# Altium PCB AM6442 X7.PcbDoc (part 1 of 2)
Units mm, origin at the board's own origin, x right, y up, seen from the top; angles counter-clockwise.
Board outline 52 x 52 mm, 8 copper layers (SU, GNDU, HSU, PWRU, PWRD, HSD, GNDD, SD), stack 0.757 mm thick; 216 components, 45 nets, 958 pads, 229 vias.
Unrouted connection lines stored in the file: 81.
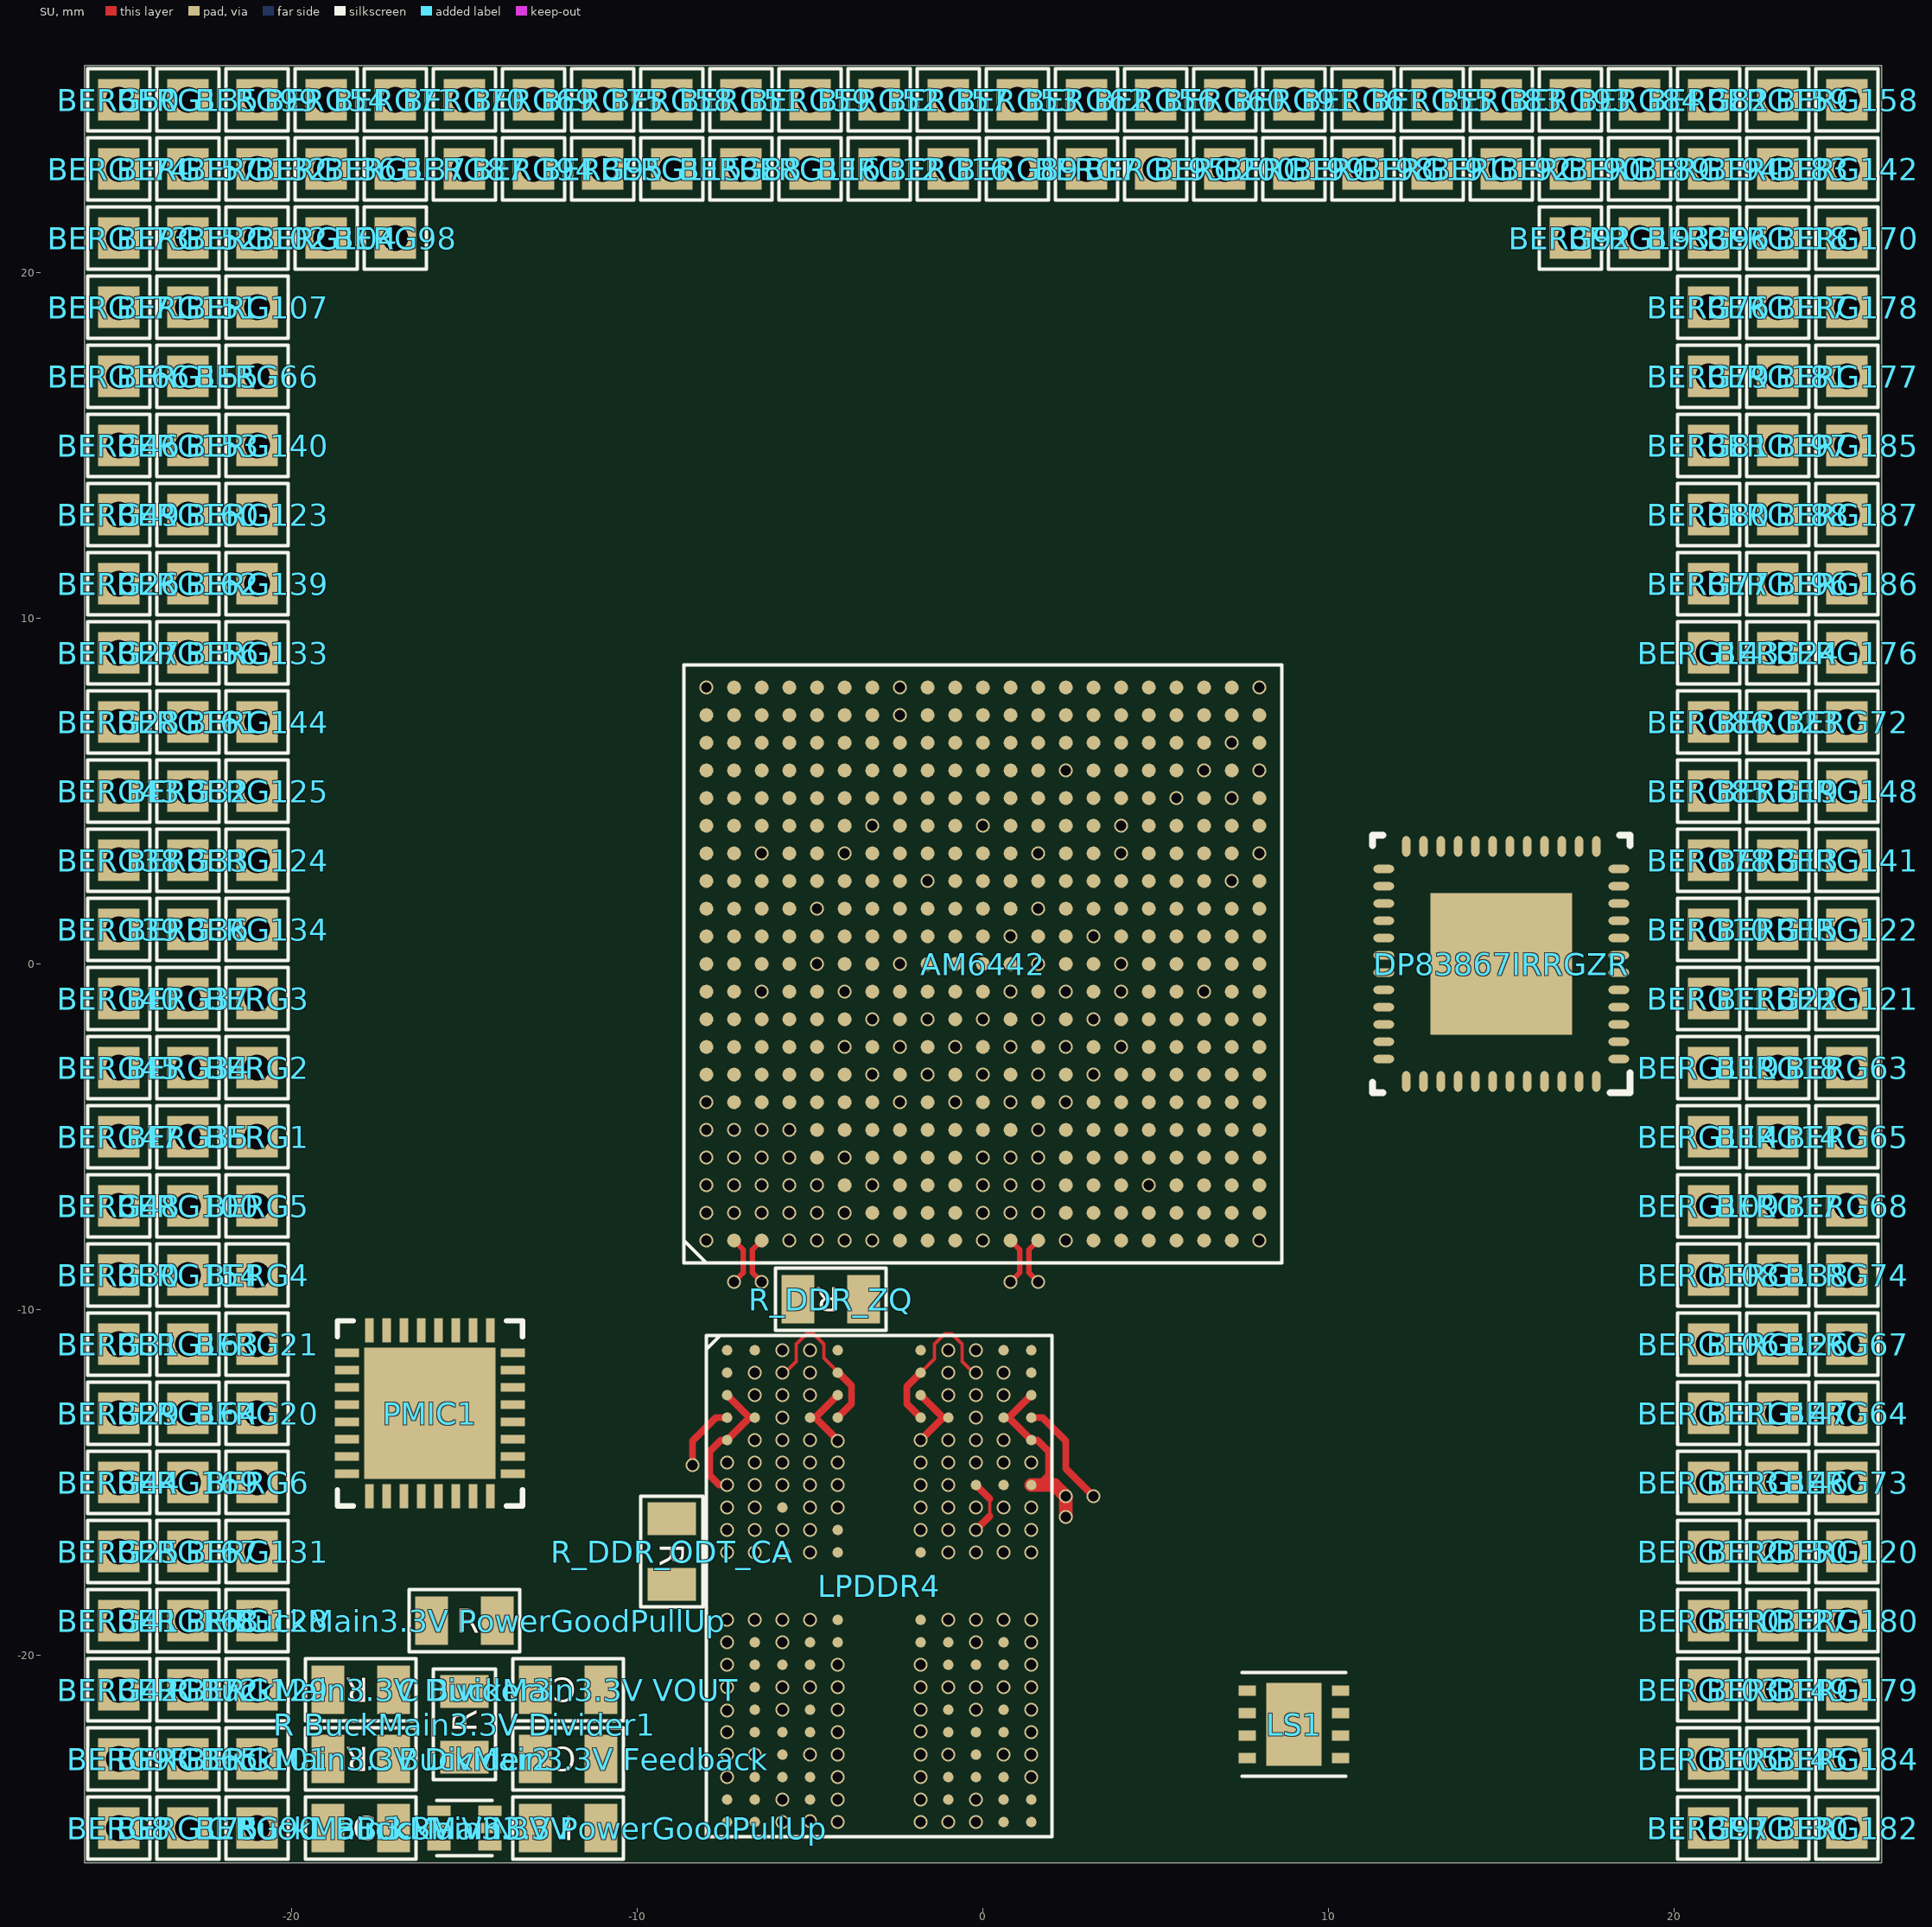
[diagram p0: SU view]
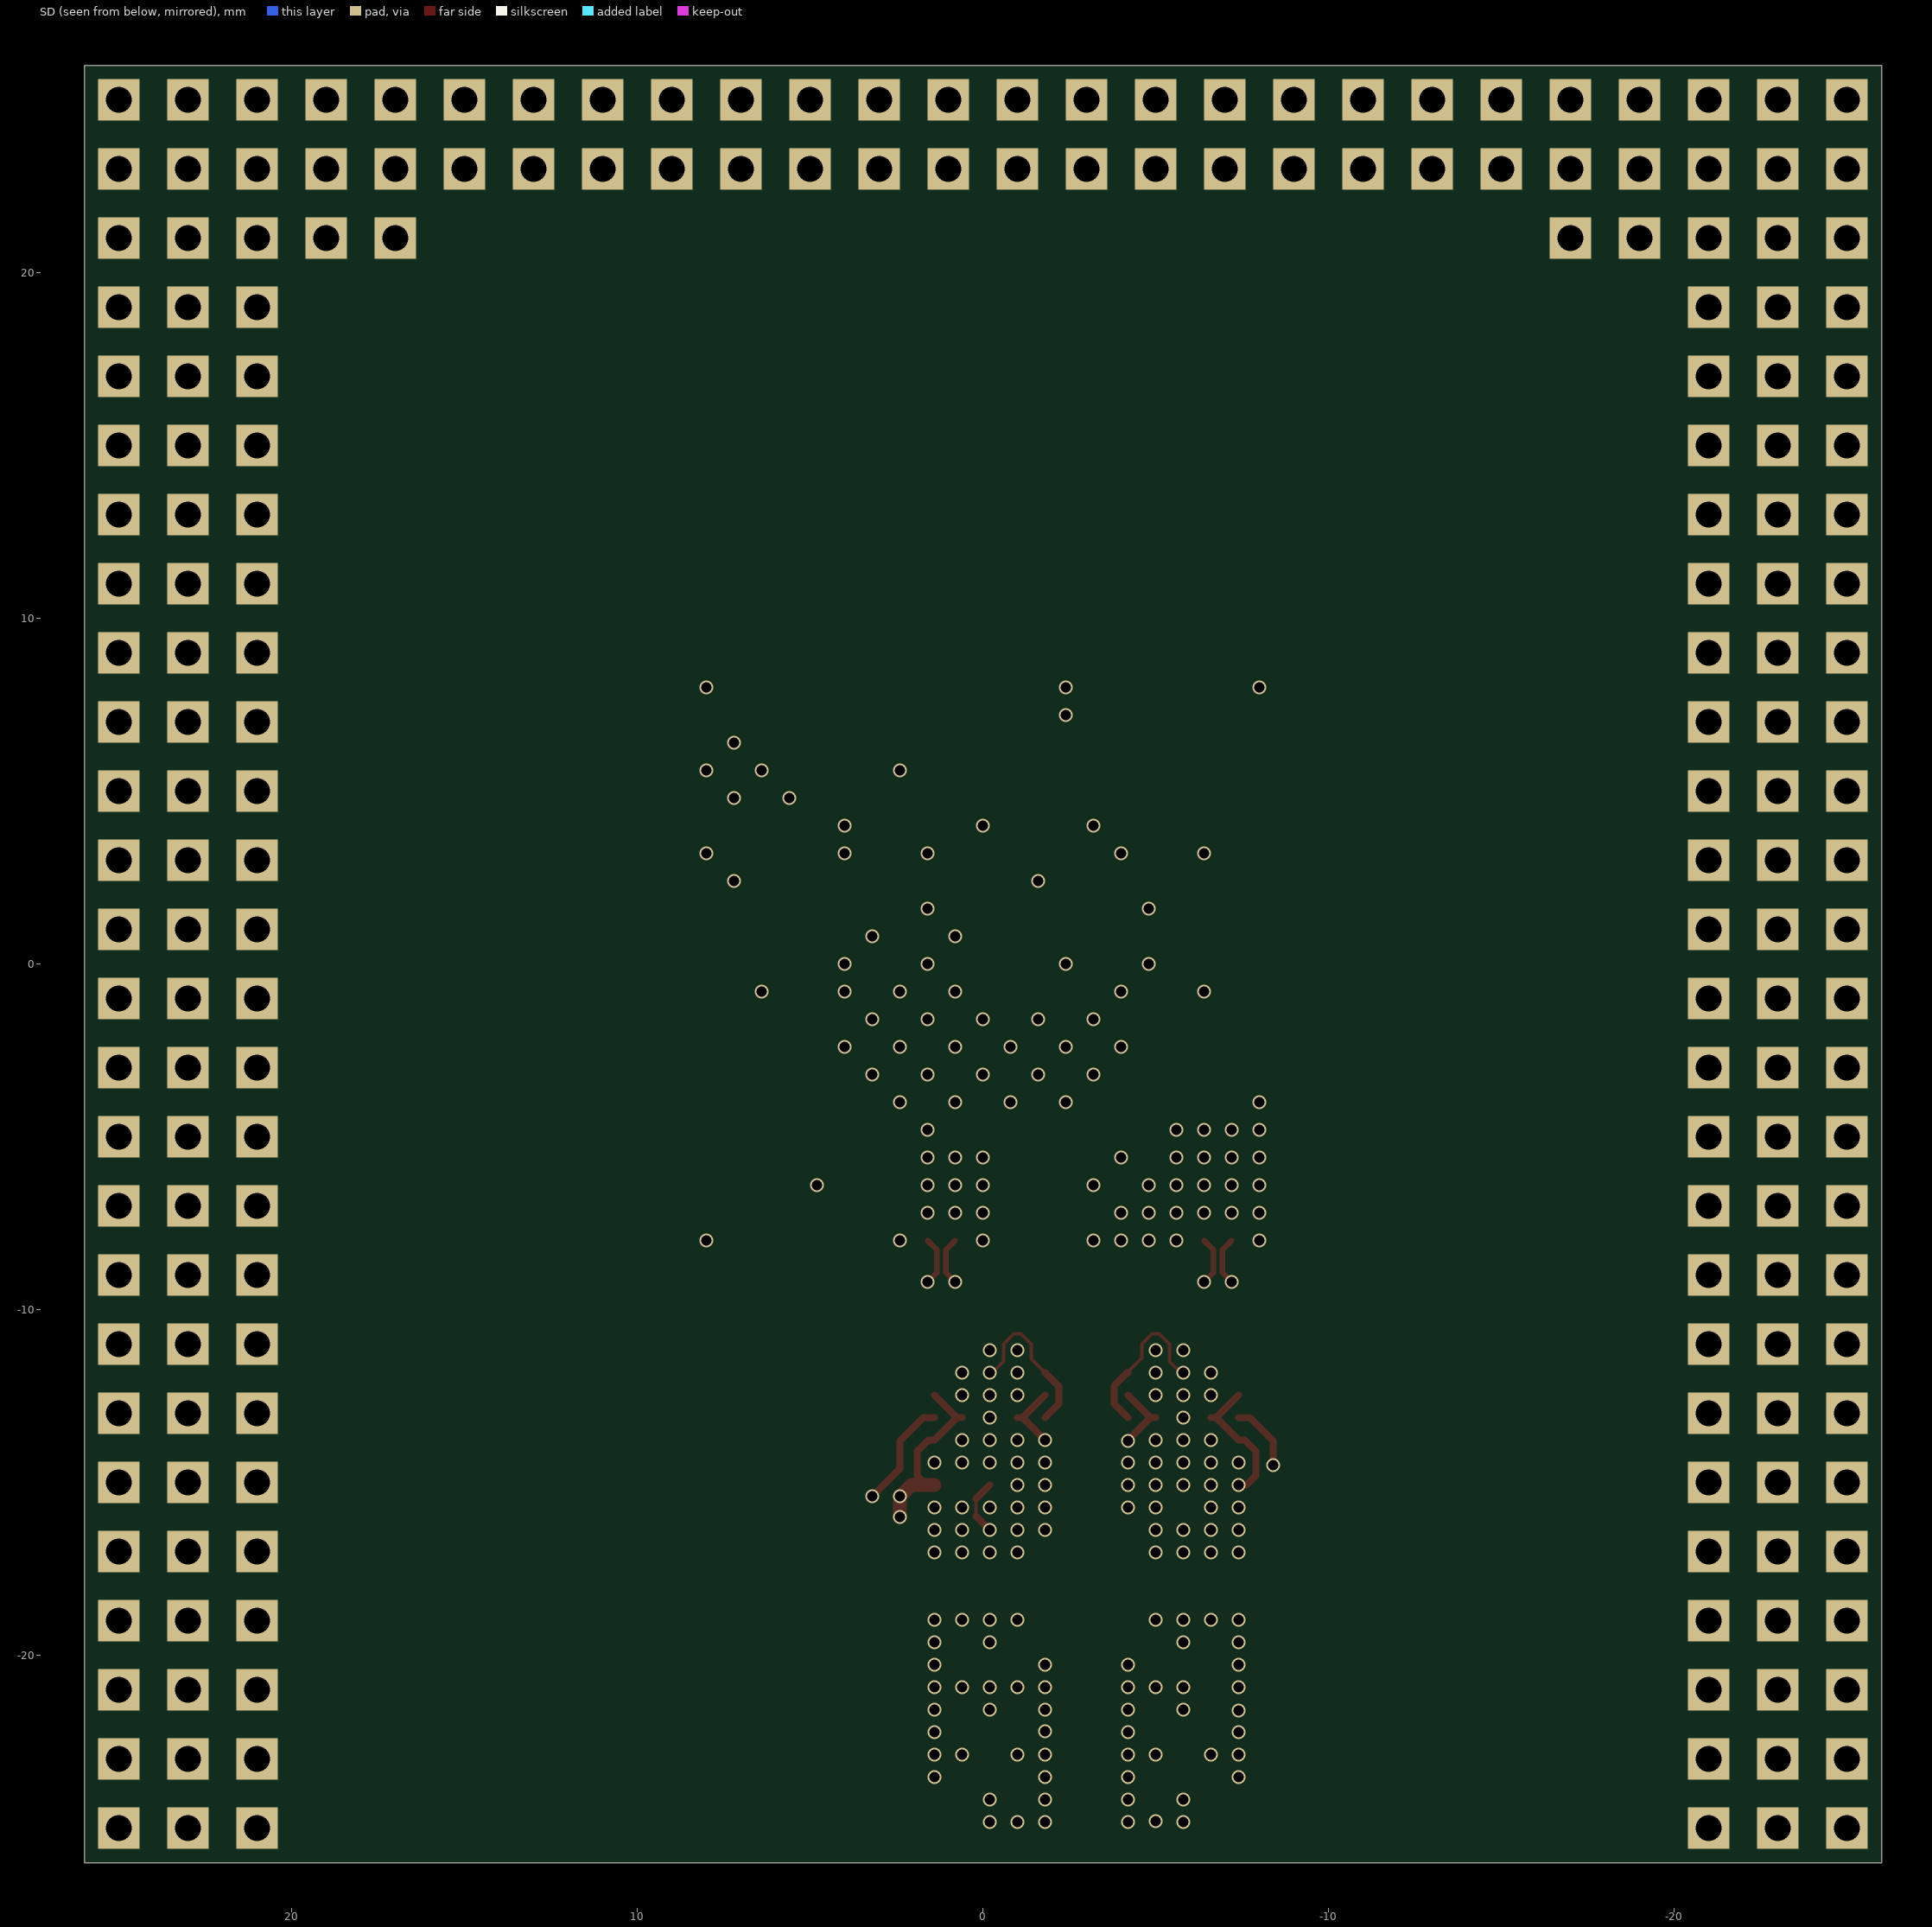
[diagram p1: SD view, seen from below]
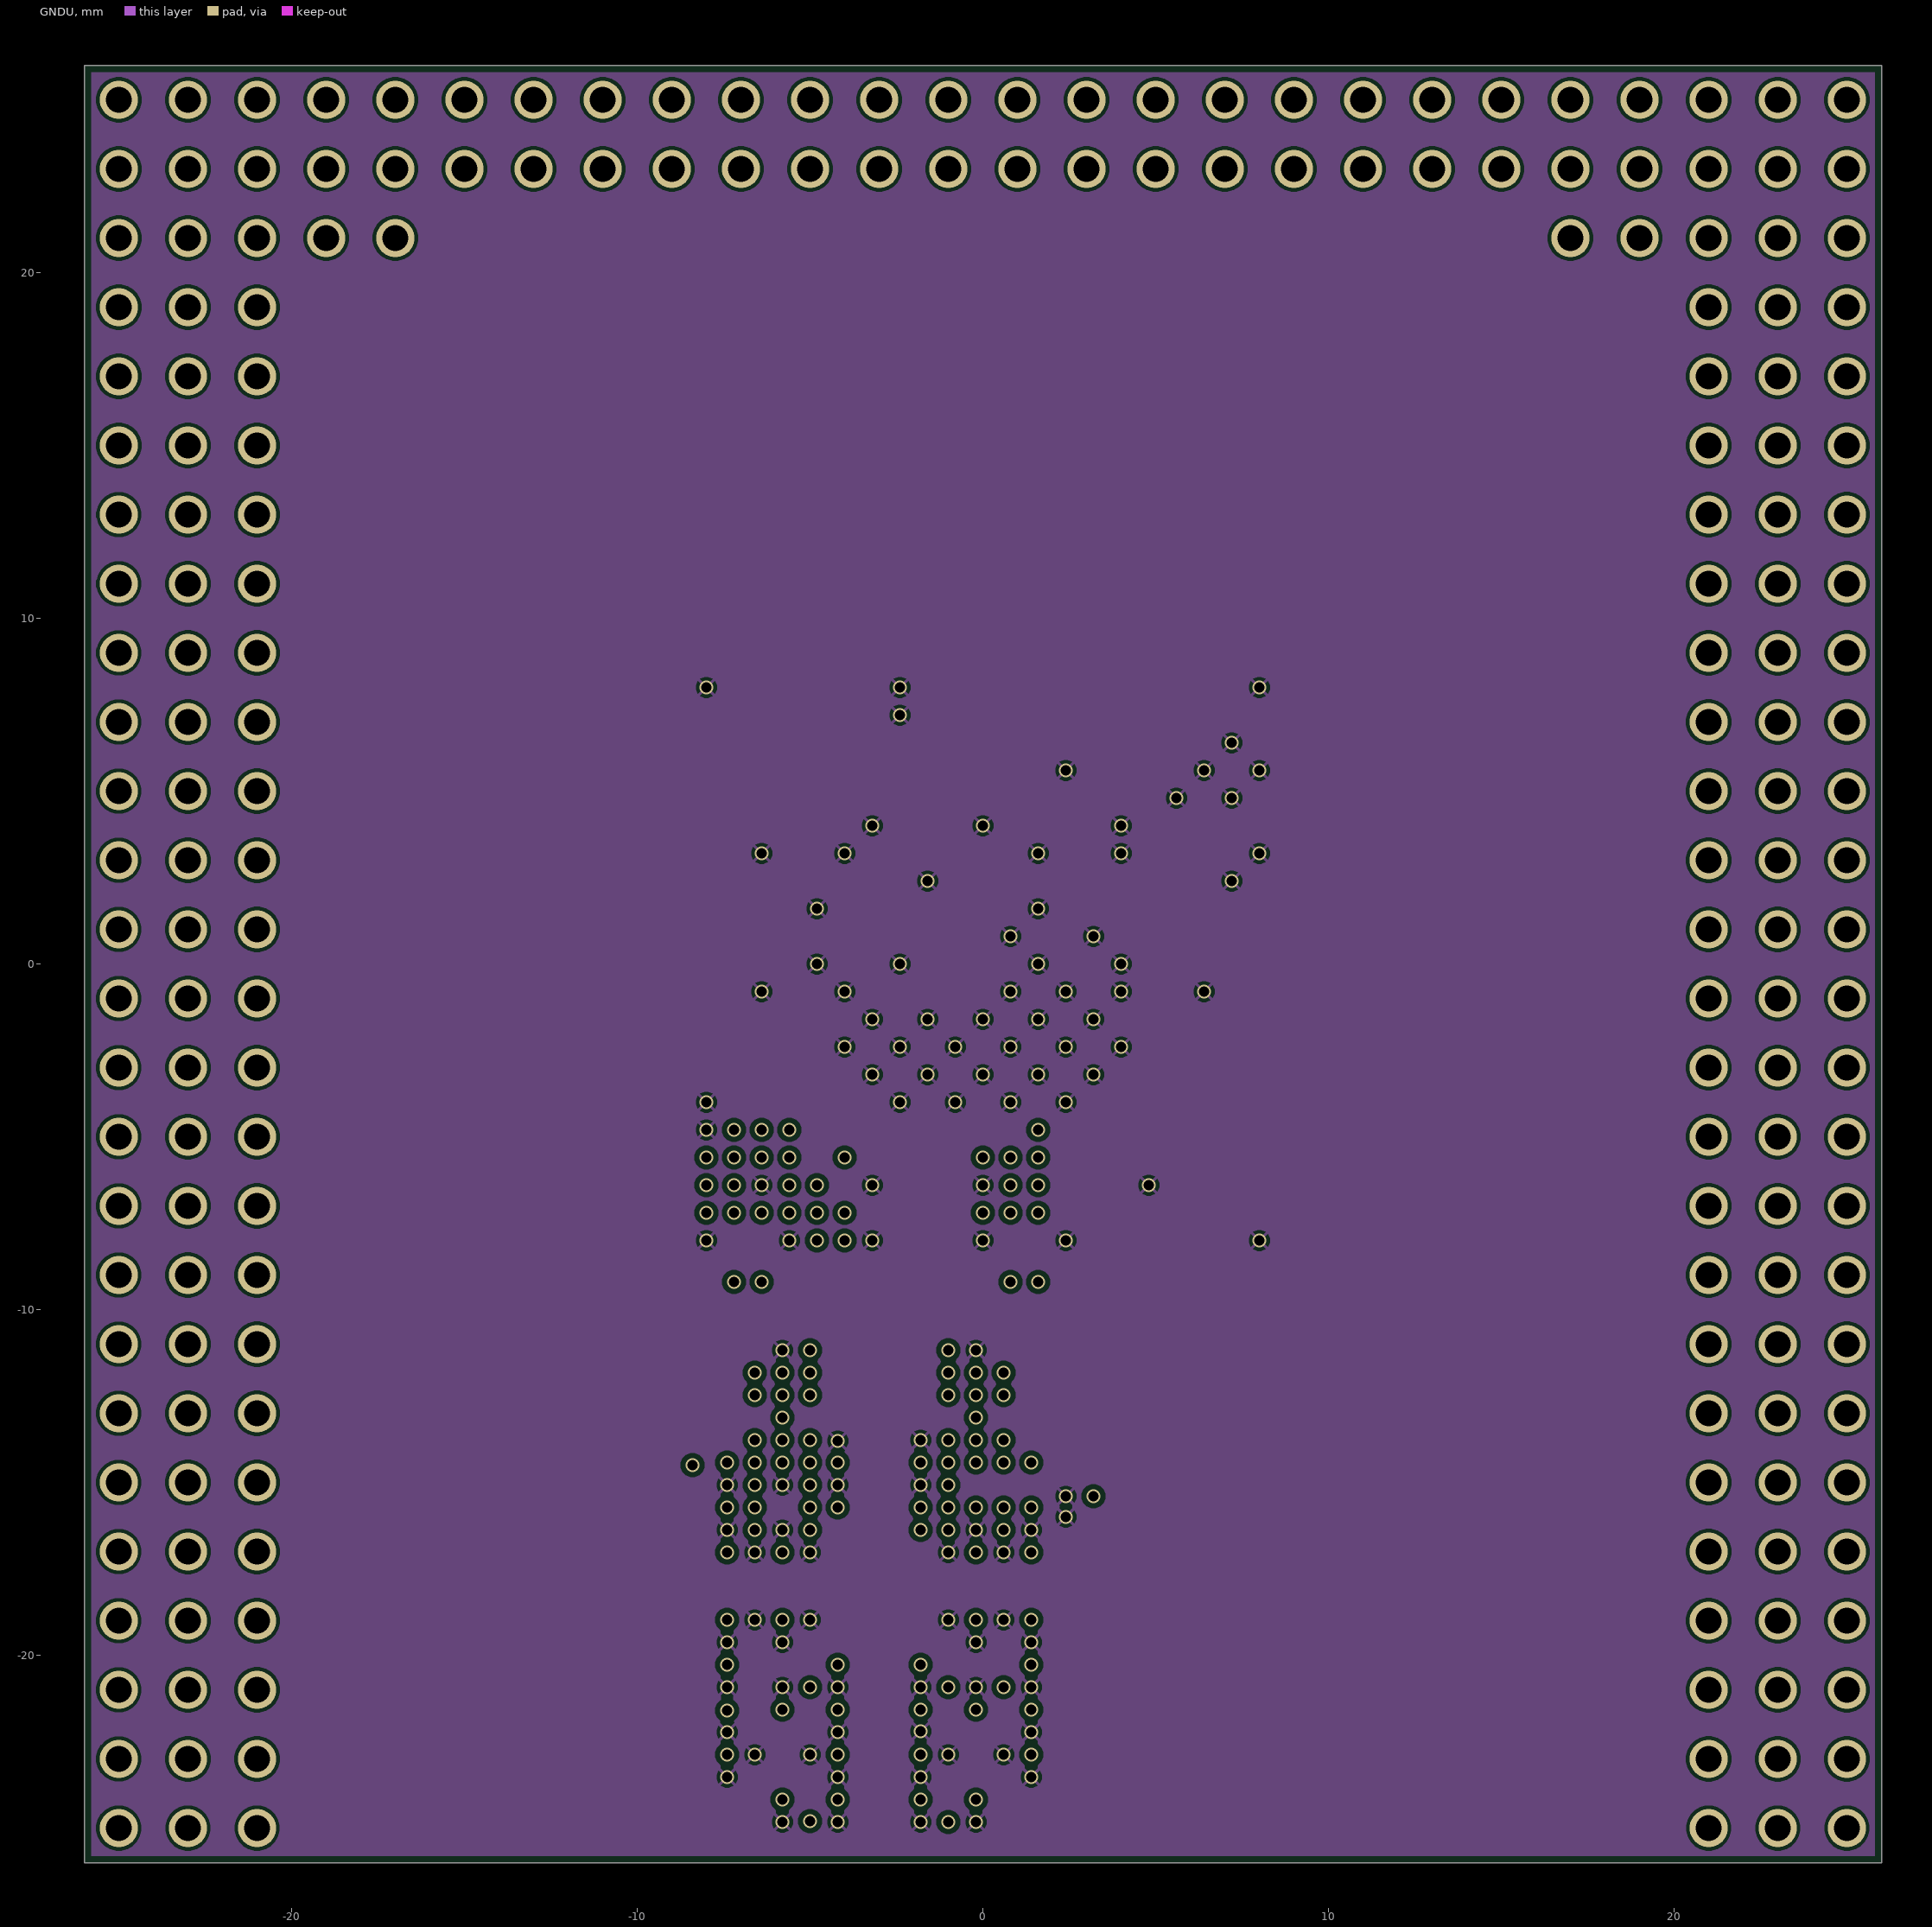
[diagram p2: GNDU]
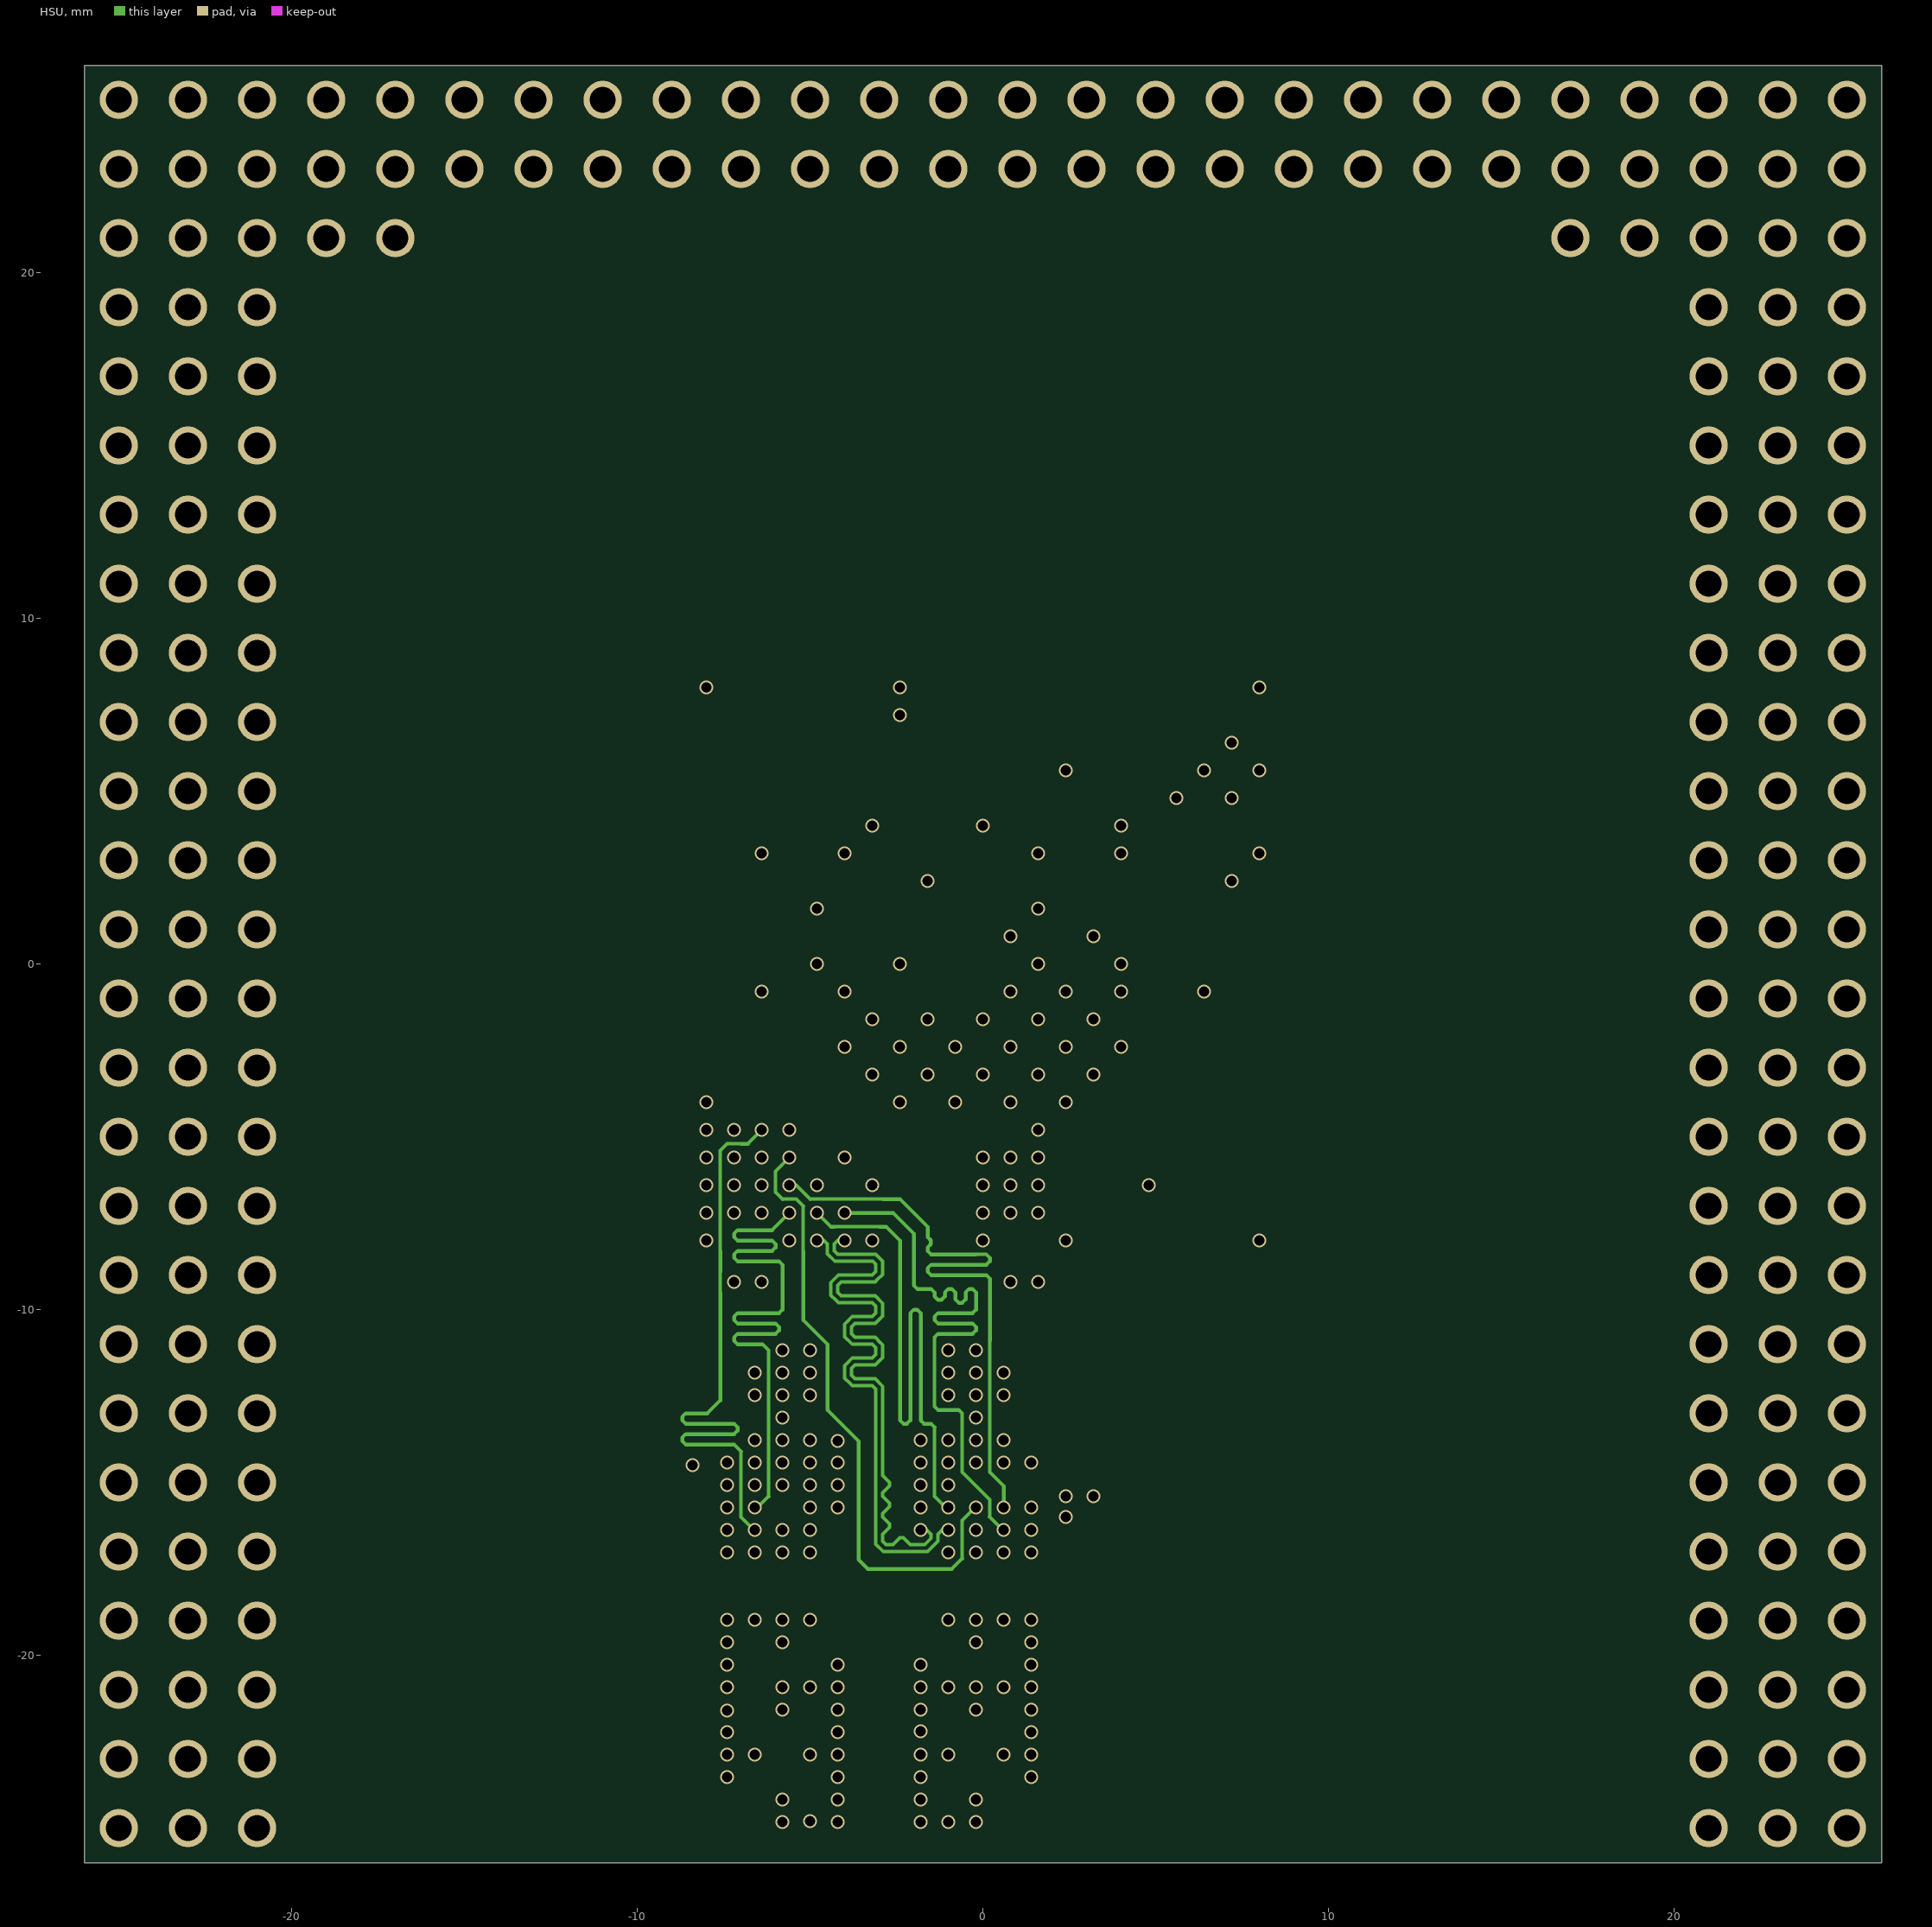
[diagram p3: HSU]
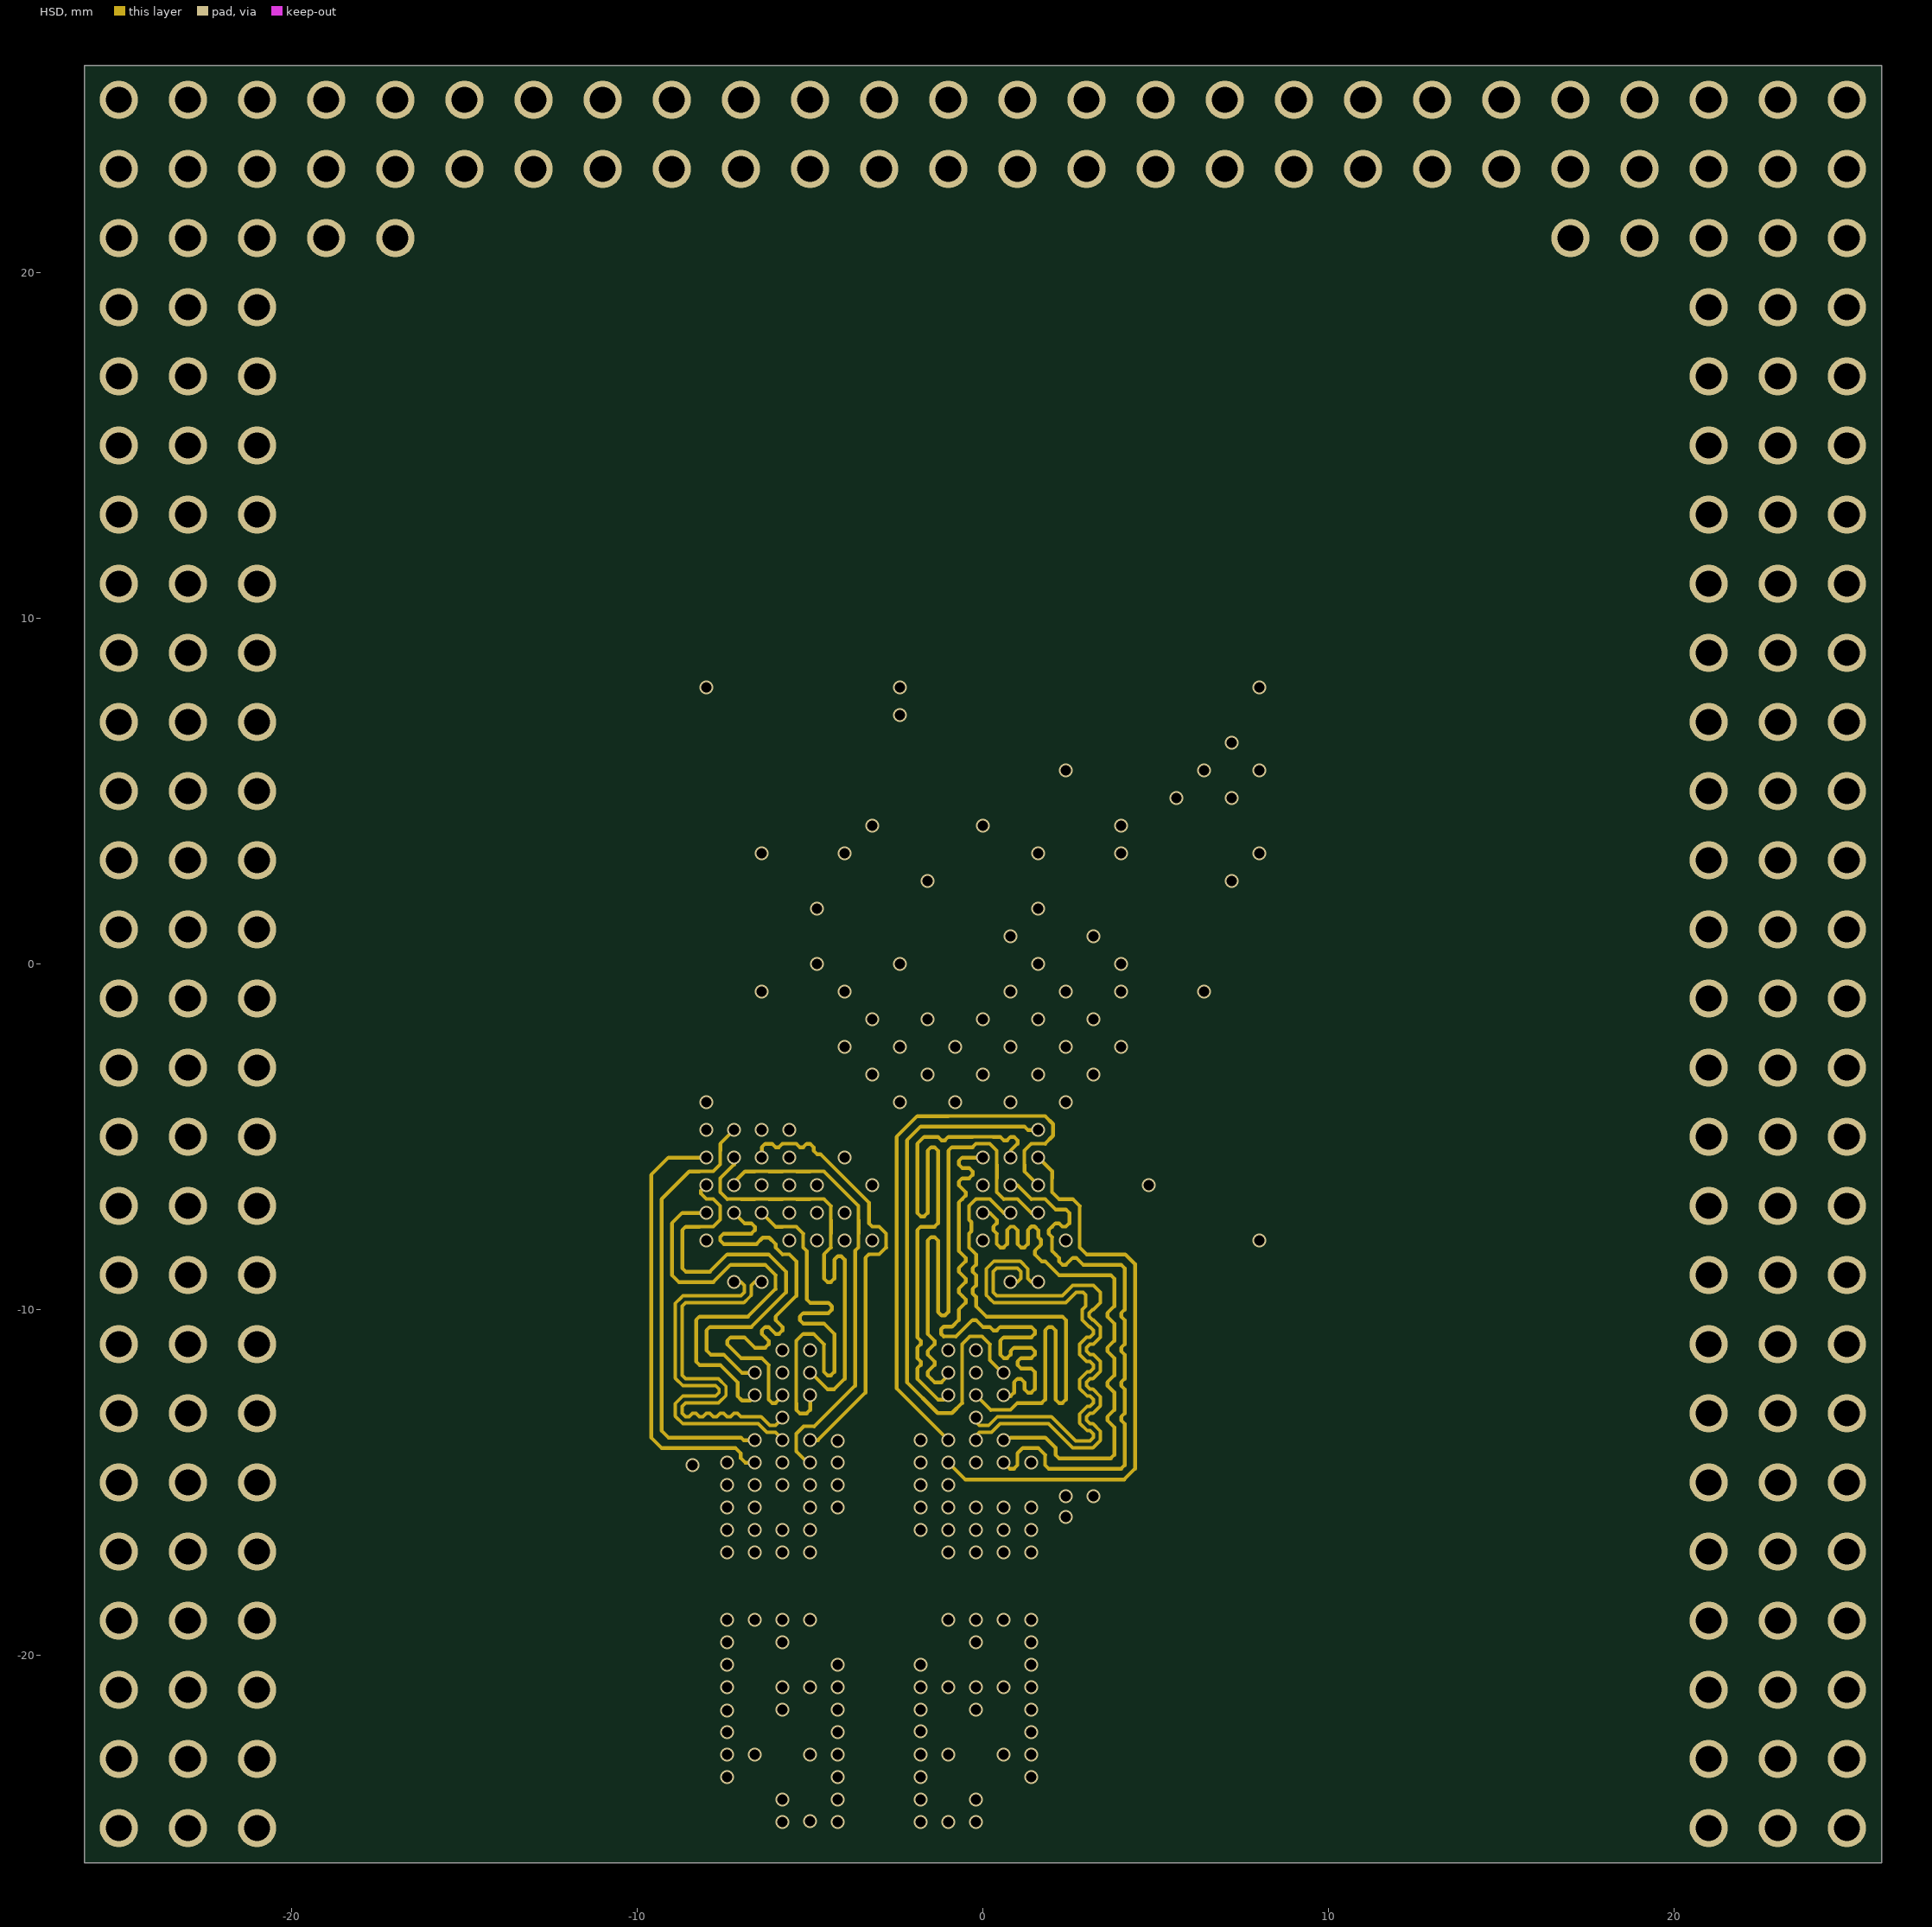
[diagram p4: HSD]
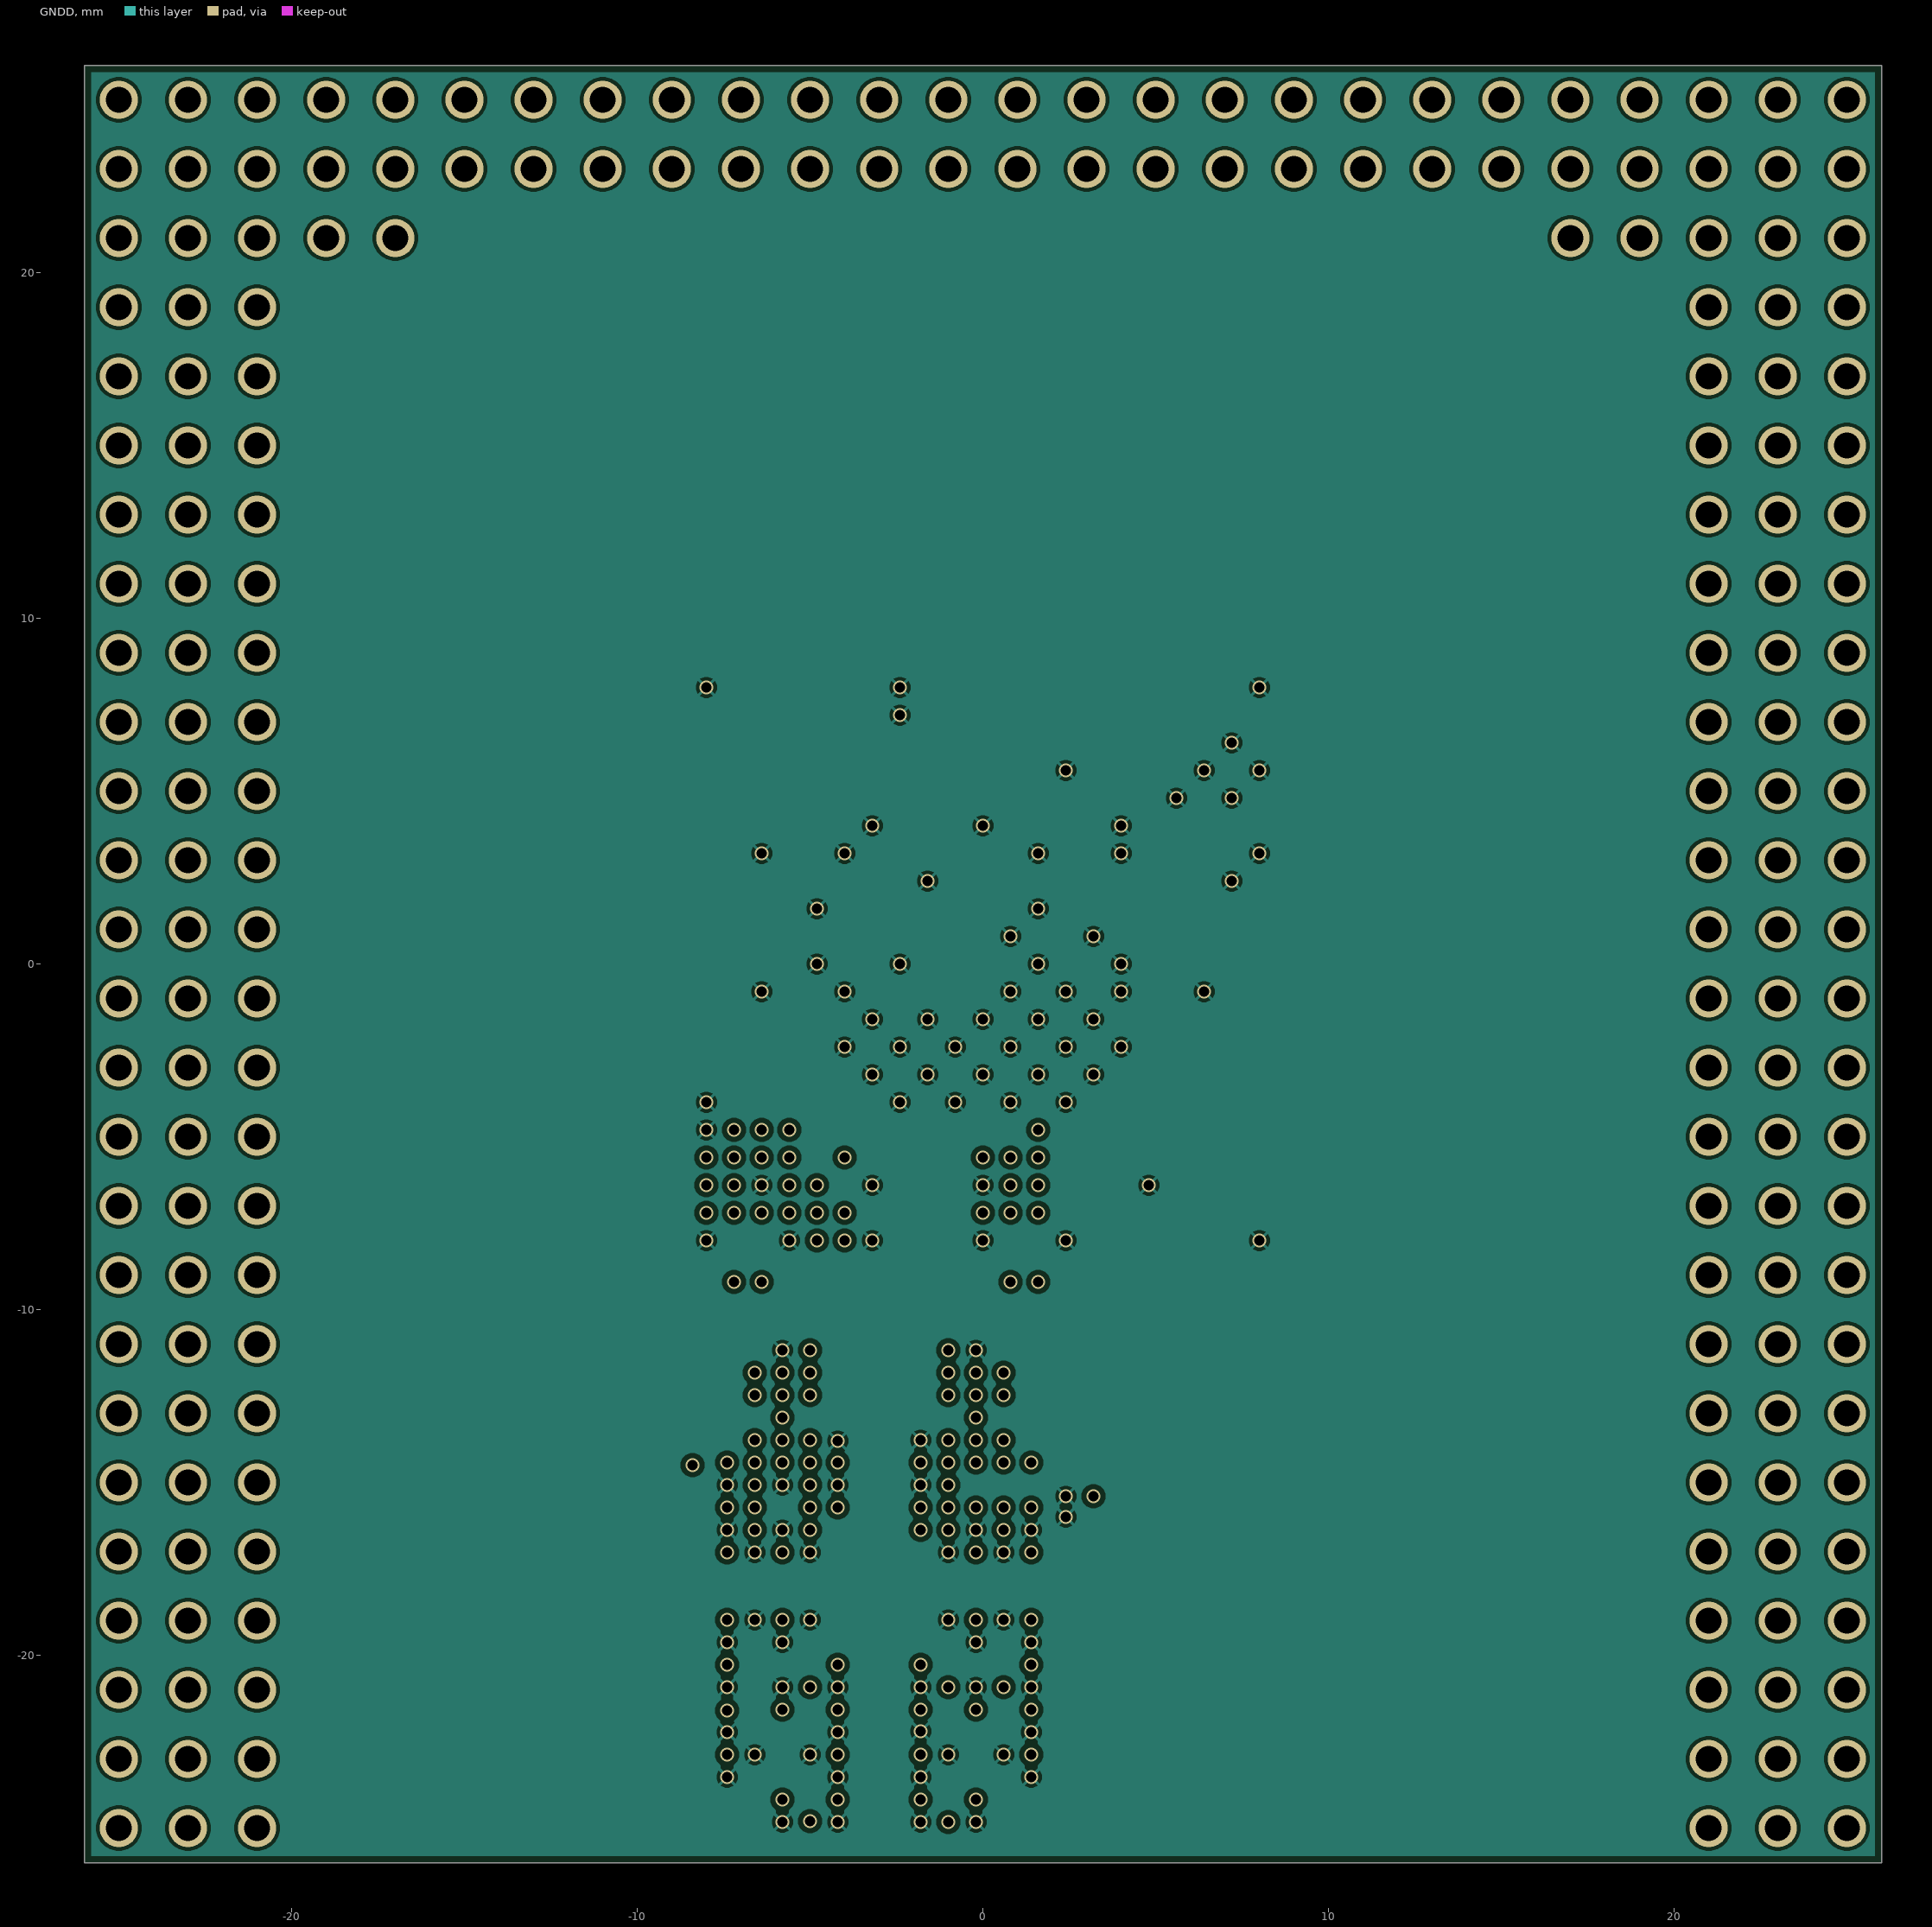
[diagram p5: GNDD]

## Layer stack, top to bottom
Top Solder: solder mask 0.03, Solder Resist, Dk 3.8
SU: signal copper 0.035
Prepreg 1/2: prepreg 0.0764, Prepreg, Dk 3.91
GNDU: signal copper 0.0152
Core 2/3: core 0.075, Core, Dk 3.99
HSU: signal copper 0.0152
Prepreg 3/4: prepreg 0.1088, Prepreg, Dk 4.16
PWRU: signal copper 0.0152
Core 4/5: core 0.075, Core, Dk 3.99
PWRD: signal copper 0.0152
Prepreg 5/6: prepreg 0.1088, Prepreg, Dk 4.16
HSD: signal copper 0.0152
Core 6/7: core 0.075, Core, Dk 3.99
GNDD: signal copper 0.0152
Prepreg 7/8: prepreg 0.0764, Prepreg, Dk 3.91
SD: signal copper 0.035
Bottom Solder: solder mask 0.03, Solder Resist, Dk 3.8

## Board outline
-26,-26 -26,26 26,26 26,-26

## Design rules (kind name [scope] priority, off if disabled: settings)
BoardOutlineClearance [All] p1 off: gap=0.2 ignorepadtopadclearanceinfootprint=FALSE
Clearance [All] p1: gap=0.099 ignorepadtopadclearanceinfootprint=TRUE except(0.199: Arc-Hole Track-Hole SMDPad-Hole THPad-Hole Via-Hole Fill-Hole Poly-Hole Region-Hole Text-Hole)
ComponentClearance [All] p1: gap=0 collisioncheckmode=3 verticalgap=2540 showdistances=FALSE
DiffPairsRouting DiffPairsRouting_DDR_Address_Clock [InDifferentialPairClass('DDR_Address_Clock')] p1: maxlimit=0.5 minlimit=0.09 mostfreqgap=0.11 toplayer_mingap=0.1 toplayer_prefgap=0.1 toplayer_minwidth=0.16 toplayer_maxwidth=0.16 toplayer_prefwidth=0.16 midlayer2_mingap=0.104 midlayer2_prefgap=0.104 midlayer2_minwidth=0.096 midlayer2_maxwidth=0.096 midlayer2_prefwidth=0.096 midlayer5_mingap=0.104 midlayer5_prefgap=0.104 midlayer5_minwidth=0.096 midlayer5_maxwidth=0.096 midlayer5_prefwidth=0.096 bottomlayer_mingap=0.1 bottomlayer_prefgap=0.1 bottomlayer_minwidth=0.16 bottomlayer_maxwidth=0.16 bottomlayer_prefwidth=0.16 impedanceprofiledriven=TRUE impedanceprofileid={31A8B4D8-5093-4C39-AB75-1D34C4341116} impedanceprofilevalue=80.000000 maxuncoupledlength=10
DiffPairsRouting DiffPairsRouting_DDR_Byte0_Clock [InDifferentialPairClass('DDR_Byte0_Clock')] p2: maxlimit=0.5 minlimit=0.09 mostfreqgap=0.11 toplayer_mingap=0.1 toplayer_prefgap=0.1 toplayer_minwidth=0.16 toplayer_maxwidth=0.16 toplayer_prefwidth=0.16 midlayer2_mingap=0.104 midlayer2_prefgap=0.104 midlayer2_minwidth=0.096 midlayer2_maxwidth=0.096 midlayer2_prefwidth=0.096 midlayer5_mingap=0.104 midlayer5_prefgap=0.104 midlayer5_minwidth=0.096 midlayer5_maxwidth=0.096 midlayer5_prefwidth=0.096 bottomlayer_mingap=0.1 bottomlayer_prefgap=0.1 bottomlayer_minwidth=0.16 bottomlayer_maxwidth=0.16 bottomlayer_prefwidth=0.16 impedanceprofiledriven=TRUE impedanceprofileid={31A8B4D8-5093-4C39-AB75-1D34C4341116} impedanceprofilevalue=80.000000 maxuncoupledlength=10
DiffPairsRouting DiffPairsRouting_DDR_Byte1_Clock [InDifferentialPairClass('DDR_Byte1_Clock')] p3: maxlimit=0.5 minlimit=0.09 mostfreqgap=0.11 toplayer_mingap=0.1 toplayer_prefgap=0.1 toplayer_minwidth=0.16 toplayer_maxwidth=0.16 toplayer_prefwidth=0.16 midlayer2_mingap=0.104 midlayer2_prefgap=0.104 midlayer2_minwidth=0.096 midlayer2_maxwidth=0.096 midlayer2_prefwidth=0.096 midlayer5_mingap=0.104 midlayer5_prefgap=0.104 midlayer5_minwidth=0.096 midlayer5_maxwidth=0.096 midlayer5_prefwidth=0.096 bottomlayer_mingap=0.1 bottomlayer_prefgap=0.1 bottomlayer_minwidth=0.16 bottomlayer_maxwidth=0.16 bottomlayer_prefwidth=0.16 impedanceprofiledriven=TRUE impedanceprofileid={31A8B4D8-5093-4C39-AB75-1D34C4341116} impedanceprofilevalue=80.000000 maxuncoupledlength=10
HoleSize [All] p1: absolutevalues=TRUE maxlimit=1 minlimit=0.3 maxpercent=80.000 minpercent=20.000
HoleToHoleClearance [All] p1: gap=0.499 allowstackedmicrovias=TRUE
Length Length_DDR [InNetClass('DDR_HighSpeed')] p1: maxlimit=2540 minlimit=0 usedelayunits=TRUE mindelay=0.000000 maxdelay=500.000000
MatchedLengths MatchedLengths_DDR_Address [InNetClass('DDR_Address')] p1: tolerance=3 checknetsindiffpair=FALSE checkdiffpairvsdiffpair=TRUE checkxsignals=TRUE checkothers=TRUE usedelayunits=TRUE delaytolerance=3.000000
MatchedLengths MatchedLengths_DDR_Address_Clock [InDifferentialPair('DDR_CK0')] p2: tolerance=3 checknetsindiffpair=TRUE checkdiffpairvsdiffpair=FALSE checkxsignals=FALSE checkothers=FALSE usedelayunits=TRUE delaytolerance=0.400000
MatchedLengths MatchedLengths_DDR_Byte0 [InNetClass('DDR_Byte0')] p3: tolerance=3 checknetsindiffpair=FALSE checkdiffpairvsdiffpair=TRUE checkxsignals=TRUE checkothers=TRUE usedelayunits=TRUE delaytolerance=2.000000
MatchedLengths MatchedLengths_DDR_Byte0_CLock [InDifferentialPair('DDR_DQS0')] p4: tolerance=3 checknetsindiffpair=TRUE checkdiffpairvsdiffpair=FALSE checkxsignals=FALSE checkothers=FALSE usedelayunits=TRUE delaytolerance=0.400000
MatchedLengths MatchedLengths_DDR_Byte1 [InNetClass('DDR_Byte1')] p5: tolerance=3 checknetsindiffpair=FALSE checkdiffpairvsdiffpair=TRUE checkxsignals=TRUE checkothers=TRUE usedelayunits=TRUE delaytolerance=2.000000
MatchedLengths MatchedLengths_DDR_Byte1_Clock [InDifferentialPair('DDR_DQS1')] p6: tolerance=3 checknetsindiffpair=TRUE checkdiffpairvsdiffpair=FALSE checkxsignals=FALSE checkothers=FALSE usedelayunits=TRUE delaytolerance=0.400000
MinimumAnnularRing [All] p1: minimumring=0.05
MinimumSolderMaskSliver [Not(InComponent('DP83867'))] p1: minsoldermaskwidth=0.1
NetAntennae [InNet('No Net')] p1: netantennaetolerance=0
ParallelSegment [InNetClass('DDR_HighSpeed')] p1: limit=12.7 gap=0.3
PlaneClearance [All] p1: clearance=0.1
PlaneConnect [All] p1: planeconnectstyle=Relief reliefexpansion=0.1 reliefentries=4 reliefconductorwidth=0.1 reliefairgap=0.1
PolygonConnect [All] p1: connectstyle=Relief reliefconductorwidth=0.1 reliefentries=4 polygonreliefangle="45 Angle" airgapwidth=0.1
RoutingVias [All] p1: holewidth=0.3 width=0.4 viastyle="Through Hole" minholewidth=0.3 minwidth=0.4 maxholewidth=0.5 maxwidth=0.6
SilkToSilkClearance [All] p1: silktosilkclearance=0.1
SilkToSolderMaskClearance [IsPad] p1: minsilkscreentomaskgap=0.1 clearancetoexposedcopper=TRUE
SolderMaskExpansion [All] p1: expansion=0.04 istentingtop=FALSE
SupplyNets "Schematic Supply Nets_5" [InNet('3.3V')] p1: voltage=0.000
SupplyNets "Schematic Supply Nets_4" [InNet('5V')] p2: voltage=0.000
SupplyNets "Schematic Supply Nets_3" [InNet('DDR_VDD1')] p3: voltage=0.000
SupplyNets "Schematic Supply Nets_2" [InNet('DDR_VDD2')] p4: voltage=0.000
SupplyNets "Schematic Supply Nets_1" [InNet('DDR_VDDQ')] p5: voltage=0.000
SupplyNets "Schematic Supply Nets" [InNet('GND')] p6: voltage=0.000
UnRoutedNet [InNet('No Net')] p1:
ViasUnderSMD [All] p1: allowed=TRUE
Width [Not(InNetClass('DDR_HighSpeed'))] p1: maxlimit=0.5 minlimit=0.1 preferedwidth=0.1
Width Width_DDR_Byte0 [InNetClass('DDR_Byte0')] p2: maxlimit=0.5 minlimit=0.1 preferedwidth=0.112 toplayer_maxwidth=0.209 toplayer_prefwidth=0.209 midlayer2_maxwidth=0.112 midlayer5_maxwidth=0.112 bottomlayer_maxwidth=0.209 bottomlayer_prefwidth=0.209 impedanceprofiledriven=TRUE impedanceprofileid={3CD2BC14-9CBE-4EFF-94EC-B89DB1E22AF3} impedanceprofilevalue=40.000000 minimp=50.000000 maximp=50.000000 favimp=50.000000
Width Width_DDR_Byte1 [InNetClass('DDR_Byte1')] p3: maxlimit=0.5 minlimit=0.1 preferedwidth=0.112 toplayer_maxwidth=0.209 toplayer_prefwidth=0.209 midlayer2_maxwidth=0.112 midlayer5_maxwidth=0.112 bottomlayer_maxwidth=0.209 bottomlayer_prefwidth=0.209 impedanceprofiledriven=TRUE impedanceprofileid={3CD2BC14-9CBE-4EFF-94EC-B89DB1E22AF3} impedanceprofilevalue=40.000000 minimp=50.000000 maximp=50.000000 favimp=50.000000
Width Width_DDR_Address [InNetClass('DDR_Address')] p4: maxlimit=0.5 minlimit=0.1 preferedwidth=0.112 toplayer_maxwidth=0.209 toplayer_prefwidth=0.209 midlayer2_maxwidth=0.112 midlayer5_maxwidth=0.112 bottomlayer_maxwidth=0.209 bottomlayer_prefwidth=0.209 impedanceprofiledriven=TRUE impedanceprofileid={3CD2BC14-9CBE-4EFF-94EC-B89DB1E22AF3} impedanceprofilevalue=40.000000 minimp=50.000000 maximp=50.000000 favimp=50.000000
19 further rules are at their usual default settings.

## Classes and differential pairs
net class DDR: DDR_A0 DDR_A1 DDR_A2 DDR_A3 DDR_A4 DDR_A5 DDR_CK0_N DDR_CK0_P DDR_CKE DDR_CS DDR_DM0 DDR_DM1 DDR_DQ0 DDR_DQ1 DDR_DQ2 DDR_DQ3 DDR_DQ4 DDR_DQ5 DDR_DQ6 DDR_DQ7 DDR_DQ8 DDR_DQ9 DDR_DQ10 DDR_DQ11 DDR_DQ12 DDR_DQ13 DDR_DQ14 DDR_DQ15 DDR_DQS0_N DDR_DQS0_P DDR_DQS1_N DDR_DQS1_P DDR_RESET
differential pair class DDR_Byte1_Clock: DDR_DQS1
differential pair class DDR_Byte0_Clock: DDR_DQS0
differential pair class DDR_Address_Clock: DDR_CK0
net class DDR_HighSpeed: DDR_A0 DDR_A1 DDR_A2 DDR_A3 DDR_A4 DDR_A5 DDR_CK0_N DDR_CK0_P DDR_DM0 DDR_DM1 DDR_DQ0 DDR_DQ1 DDR_DQ2 DDR_DQ3 DDR_DQ4 DDR_DQ5 DDR_DQ6 DDR_DQ7 DDR_DQ8 DDR_DQ9 DDR_DQ10 DDR_DQ11 DDR_DQ12 DDR_DQ13 DDR_DQ14 DDR_DQ15 DDR_DQS0_N DDR_DQS0_P DDR_DQS1_N DDR_DQS1_P
net class DDR_Byte1: DDR_DM1 DDR_DQ8 DDR_DQ9 DDR_DQ10 DDR_DQ11 DDR_DQ12 DDR_DQ13 DDR_DQ14 DDR_DQ15 DDR_DQS1_N DDR_DQS1_P
net class DDR_Byte0: DDR_DM0 DDR_DQ0 DDR_DQ1 DDR_DQ2 DDR_DQ3 DDR_DQ4 DDR_DQ5 DDR_DQ6 DDR_DQ7 DDR_DQS0_N DDR_DQS0_P
net class DDR_Address: DDR_A0 DDR_A1 DDR_A2 DDR_A3 DDR_A4 DDR_A5 DDR_CK0_N DDR_CK0_P
differential pair DDR_DQS1: +DDR_DQS1_P -DDR_DQS1_N
differential pair DDR_DQS0: +DDR_DQS0_P -DDR_DQS0_N
differential pair DDR_CK0: +DDR_CK0_P -DDR_CK0_N

## Components (designator, comment, footprint, x,y, rotation, side; value= is the part's Value field where it differs from the comment)
AM6442 "ARM Cortex-A53, ARM Cortex-M5F, ARM Cortex-R5F Microprocessor IC Sitara 7 Core, 64-Bit 1GHz 441-FCBGA (17.2x17.2)   Source:  Datasheet" AM6442 0,0 r90 top
BERG1 "BergStrip" HDRV1W50P0_1X1_200X200X800C -21,-5 r270 top
BERG2 "BergStrip" HDRV1W50P0_1X1_200X200X800C -21,-3 r270 top
BERG3 "BergStrip" HDRV1W50P0_1X1_200X200X800C -21,-1 r270 top
BERG4 "BergStrip" HDRV1W50P0_1X1_200X200X800C -21,-9 r270 top
BERG5 "BergStrip" HDRV1W50P0_1X1_200X200X800C -21,-7 r270 top
BERG6 "BergStrip" HDRV1W50P0_1X1_200X200X800C -21,-15 r270 top
BERG7 "BergStrip" HDRV1W50P0_1X1_200X200X800C 3,23 r180 top
BERG8 "BergStrip" HDRV1W50P0_1X1_200X200X800C -25,-25 r90 top
BERG9 "BergStrip" HDRV1W50P0_1X1_200X200X800C -25,-23 r90 top
BERG10 "BergStrip" HDRV1W50P0_1X1_200X200X800C 21,1 r270 top
BERG11 "BergStrip" HDRV1W50P0_1X1_200X200X800C 21,-1 r270 top
BERG12 "BergStrip" HDRV1W50P0_1X1_200X200X800C -3,23 r180 top
BERG13 "BergStrip" HDRV1W50P0_1X1_200X200X800C 23,3 r90 top
BERG14 "BergStrip" HDRV1W50P0_1X1_200X200X800C 23,-5 r90 top
BERG15 "BergStrip" HDRV1W50P0_1X1_200X200X800C 23,1 r90 top
BERG16 "BergStrip" HDRV1W50P0_1X1_200X200X800C -1,23 r180 top
BERG17 "BergStrip" HDRV1W50P0_1X1_200X200X800C 23,-7 r90 top
BERG18 "BergStrip" HDRV1W50P0_1X1_200X200X800C 23,-3 r90 top
BERG19 "BergStrip" HDRV1W50P0_1X1_200X200X800C 23,5 r90 top
BERG20 "BergStrip" HDRV1W50P0_1X1_200X200X800C -21,-13 r270 top
BERG21 "BergStrip" HDRV1W50P0_1X1_200X200X800C -21,-11 r270 top
BERG22 "BergStrip" HDRV1W50P0_1X1_200X200X800C 23,-1 r90 top
BERG23 "BergStrip" HDRV1W50P0_1X1_200X200X800C 23,7 r90 top
BERG24 "BergStrip" HDRV1W50P0_1X1_200X200X800C 23,9 r90 top
BERG25 "BergStrip" HDRV1W50P0_1X1_200X200X800C -25,-17 r90 top
BERG26 "BergStrip" HDRV1W50P0_1X1_200X200X800C -25,11 r90 top
BERG27 "BergStrip" HDRV1W50P0_1X1_200X200X800C -25,9 r90 top
BERG28 "BergStrip" HDRV1W50P0_1X1_200X200X800C -25,7 r90 top
BERG29 "BergStrip" HDRV1W50P0_1X1_200X200X800C -25,-13 r90 top
BERG30 "BergStrip" HDRV1W50P0_1X1_200X200X800C -25,-9 r90 top
BERG31 "BergStrip" HDRV1W50P0_1X1_200X200X800C -25,-11 r90 top
BERG32 "BergStrip" HDRV1W50P0_1X1_200X200X800C -23,5 r90 top
BERG33 "BergStrip" HDRV1W50P0_1X1_200X200X800C -23,3 r90 top
BERG34 "BergStrip" HDRV1W50P0_1X1_200X200X800C -23,-3 r90 top
BERG35 "BergStrip" HDRV1W50P0_1X1_200X200X800C -23,-5 r90 top
BERG36 "BergStrip" HDRV1W50P0_1X1_200X200X800C -23,1 r90 top
BERG37 "BergStrip" HDRV1W50P0_1X1_200X200X800C -23,-1 r90 top
BERG38 "BergStrip" HDRV1W50P0_1X1_200X200X800C -25,3 r90 top
BERG39 "BergStrip" HDRV1W50P0_1X1_200X200X800C -25,1 r90 top
BERG40 "BergStrip" HDRV1W50P0_1X1_200X200X800C -25,-1 r90 top
BERG41 "BergStrip" HDRV1W50P0_1X1_200X200X800C -25,-19 r90 top
BERG42 "BergStrip" HDRV1W50P0_1X1_200X200X800C -25,-21 r90 top
BERG43 "BergStrip" HDRV1W50P0_1X1_200X200X800C -25,5 r90 top
BERG44 "BergStrip" HDRV1W50P0_1X1_200X200X800C -25,-15 r90 top
BERG45 "BergStrip" HDRV1W50P0_1X1_200X200X800C -25,-3 r90 top
BERG46 "BergStrip" HDRV1W50P0_1X1_200X200X800C -25,15 r90 top
BERG47 "BergStrip" HDRV1W50P0_1X1_200X200X800C -25,-5 r90 top
BERG48 "BergStrip" HDRV1W50P0_1X1_200X200X800C -25,-7 r90 top
BERG49 "BergStrip" HDRV1W50P0_1X1_200X200X800C -25,13 r90 top
BERG50 "BergStrip" HDRV1W50P0_1X1_200X200X800C -25,25 r180 top
BERG51 "BergStrip" HDRV1W50P0_1X1_200X200X800C -7,25 r180 top
BERG52 "BergStrip" HDRV1W50P0_1X1_200X200X800C -3,25 r180 top
BERG53 "BergStrip" HDRV1W50P0_1X1_200X200X800C 1,25 r180 top
BERG54 "BergStrip" HDRV1W50P0_1X1_200X200X800C -19,25 r180 top
BERG55 "BergStrip" HDRV1W50P0_1X1_200X200X800C 13,25 r180 top
BERG56 "BergStrip" HDRV1W50P0_1X1_200X200X800C 5,25 r180 top
BERG57 "BergStrip" HDRV1W50P0_1X1_200X200X800C -1,25 r180 top
BERG58 "BergStrip" HDRV1W50P0_1X1_200X200X800C -9,25 r180 top
BERG59 "BergStrip" HDRV1W50P0_1X1_200X200X800C -5,25 r180 top
BERG60 "BergStrip" HDRV1W50P0_1X1_200X200X800C 7,25 r180 top
BERG61 "BergStrip" HDRV1W50P0_1X1_200X200X800C 11,25 r180 top
BERG62 "BergStrip" HDRV1W50P0_1X1_200X200X800C 3,25 r180 top
BERG63 "BergStrip" HDRV1W50P0_1X1_200X200X800C 25,-3 r90 top
BERG64 "BergStrip" HDRV1W50P0_1X1_200X200X800C 25,-13 r90 top
BERG65 "BergStrip" HDRV1W50P0_1X1_200X200X800C 25,-5 r90 top
BERG66 "BergStrip" HDRV1W50P0_1X1_200X200X800C -21,17 r270 top
BERG67 "BergStrip" HDRV1W50P0_1X1_200X200X800C 25,-11 r90 top
BERG68 "BergStrip" HDRV1W50P0_1X1_200X200X800C 25,-7 r90 top
BERG69 "BergStrip" HDRV1W50P0_1X1_200X200X800C -13,25 r180 top
BERG70 "BergStrip" HDRV1W50P0_1X1_200X200X800C -15,25 r180 top
BERG71 "BergStrip" HDRV1W50P0_1X1_200X200X800C -17,25 r180 top
BERG72 "BergStrip" HDRV1W50P0_1X1_200X200X800C 25,7 r90 top
BERG73 "BergStrip" HDRV1W50P0_1X1_200X200X800C 25,-15 r90 top
BERG74 "BergStrip" HDRV1W50P0_1X1_200X200X800C 25,-9 r90 top
BERG75 "BergStrip" HDRV1W50P0_1X1_200X200X800C -11,25 r180 top
BERG76 "BergStrip" HDRV1W50P0_1X1_200X200X800C 21,19 r270 top
BERG77 "BergStrip" HDRV1W50P0_1X1_200X200X800C 21,11 r270 top
BERG78 "BergStrip" HDRV1W50P0_1X1_200X200X800C 21,3 r270 top
BERG79 "BergStrip" HDRV1W50P0_1X1_200X200X800C 21,17 r270 top
BERG80 "BergStrip" HDRV1W50P0_1X1_200X200X800C 21,13 r270 top
BERG81 "BergStrip" HDRV1W50P0_1X1_200X200X800C 21,15 r270 top
BERG82 "BergStrip" HDRV1W50P0_1X1_200X200X800C 21,25 r180 top
BERG83 "BergStrip" HDRV1W50P0_1X1_200X200X800C 15,25 r180 top
BERG84 "BergStrip" HDRV1W50P0_1X1_200X200X800C 19,25 r180 top
BERG85 "BergStrip" HDRV1W50P0_1X1_200X200X800C 21,5 r270 top
BERG86 "BergStrip" HDRV1W50P0_1X1_200X200X800C 21,7 r270 top
BERG87 "BergStrip" HDRV1W50P0_1X1_200X200X800C -15,23 r180 top
BERG88 "BergStrip" HDRV1W50P0_1X1_200X200X800C -7,23 r180 top
BERG89 "BergStrip" HDRV1W50P0_1X1_200X200X800C 1,23 r180 top
BERG90 "BergStrip" HDRV1W50P0_1X1_200X200X800C -21,-25 r180 top
BERG91 "BergStrip" HDRV1W50P0_1X1_200X200X800C 9,25 r180 top
BERG92 "BergStrip" HDRV1W50P0_1X1_200X200X800C 17,21 r270 top
BERG93 "BergStrip" HDRV1W50P0_1X1_200X200X800C 17,25 r180 top
BERG94 "BergStrip" HDRV1W50P0_1X1_200X200X800C -13,23 r180 top
BERG95 "BergStrip" HDRV1W50P0_1X1_200X200X800C -11,23 r180 top
BERG96 "BergStrip" HDRV1W50P0_1X1_200X200X800C 21,21 r270 top
BERG97 "BergStrip" HDRV1W50P0_1X1_200X200X800C 21,-25 r180 top
BERG98 "BergStrip" HDRV1W50P0_1X1_200X200X800C -17,21 r270 top
BERG99 "BergStrip" HDRV1W50P0_1X1_200X200X800C -21,25 r180 top
BERG100 "BergStrip" HDRV1W50P0_1X1_200X200X800C -23,-7 r90 top
BERG101 "BergStrip" HDRV1W50P0_1X1_200X200X800C -21,-23 r180 top
BERG102 "BergStrip" HDRV1W50P0_1X1_200X200X800C -21,21 r270 top
BERG103 "BergStrip" HDRV1W50P0_1X1_200X200X800C 21,-21 r270 top
BERG104 "BergStrip" HDRV1W50P0_1X1_200X200X800C -19,21 r270 top
BERG105 "BergStrip" HDRV1W50P0_1X1_200X200X800C 21,-23 r180 top
BERG106 "BergStrip" HDRV1W50P0_1X1_200X200X800C 21,-11 r270 top
BERG107 "BergStrip" HDRV1W50P0_1X1_200X200X800C -21,19 r270 top
BERG108 "BergStrip" HDRV1W50P0_1X1_200X200X800C 21,-9 r270 top
BERG109 "BergStrip" HDRV1W50P0_1X1_200X200X800C 21,-7 r270 top
BERG110 "BergStrip" HDRV1W50P0_1X1_200X200X800C 21,-19 r270 top
BERG111 "BergStrip" HDRV1W50P0_1X1_200X200X800C 21,-13 r270 top
BERG112 "BergStrip" HDRV1W50P0_1X1_200X200X800C 21,-17 r270 top
BERG113 "BergStrip" HDRV1W50P0_1X1_200X200X800C 21,-15 r270 top
BERG114 "BergStrip" HDRV1W50P0_1X1_200X200X800C 21,-5 r270 top
BERG115 "BergStrip" HDRV1W50P0_1X1_200X200X800C -9,23 r180 top
BERG116 "BergStrip" HDRV1W50P0_1X1_200X200X800C -5,23 r180 top
BERG117 "BergStrip" HDRV1W50P0_1X1_200X200X800C 23,19 r90 top
BERG118 "BergStrip" HDRV1W50P0_1X1_200X200X800C 23,21 r90 top
BERG119 "BergStrip" HDRV1W50P0_1X1_200X200X800C 21,-3 r270 top
BERG120 "BergStrip" HDRV1W50P0_1X1_200X200X800C 25,-17 r90 top
BERG121 "BergStrip" HDRV1W50P0_1X1_200X200X800C 25,-1 r90 top
BERG122 "BergStrip" HDRV1W50P0_1X1_200X200X800C 25,1 r90 top
BERG123 "BergStrip" HDRV1W50P0_1X1_200X200X800C -21,13 r270 top
BERG124 "BergStrip" HDRV1W50P0_1X1_200X200X800C -21,3 r270 top
BERG125 "BergStrip" HDRV1W50P0_1X1_200X200X800C -21,5 r270 top
BERG126 "BergStrip" HDRV1W50P0_1X1_200X200X800C 23,-11 r90 top
BERG127 "BergStrip" HDRV1W50P0_1X1_200X200X800C 23,-19 r90 top
BERG128 "BergStrip" HDRV1W50P0_1X1_200X200X800C -21,-19 r270 top
BERG129 "BergStrip" HDRV1W50P0_1X1_200X200X800C -21,-21 r270 top
BERG130 "BergStrip" HDRV1W50P0_1X1_200X200X800C 23,-25 r90 top
BERG131 "BergStrip" HDRV1W50P0_1X1_200X200X800C -21,-17 r270 top
BERG132 "BergStrip" HDRV1W50P0_1X1_200X200X800C -21,23 r180 top
BERG133 "BergStrip" HDRV1W50P0_1X1_200X200X800C -21,9 r270 top
BERG134 "BergStrip" HDRV1W50P0_1X1_200X200X800C -21,1 r270 top
BERG135 "BergStrip" HDRV1W50P0_1X1_200X200X800C -23,25 r180 top
BERG136 "BergStrip" HDRV1W50P0_1X1_200X200X800C -19,23 r180 top
BERG137 "BergStrip" HDRV1W50P0_1X1_200X200X800C -17,23 r180 top
BERG138 "BergStrip" HDRV1W50P0_1X1_200X200X800C 23,-9 r90 top
BERG139 "BergStrip" HDRV1W50P0_1X1_200X200X800C -21,11 r270 top
BERG140 "BergStrip" HDRV1W50P0_1X1_200X200X800C -21,15 r270 top
BERG141 "BergStrip" HDRV1W50P0_1X1_200X200X800C 25,3 r90 top
BERG142 "BergStrip" HDRV1W50P0_1X1_200X200X800C 25,23 r90 top
BERG143 "BergStrip" HDRV1W50P0_1X1_200X200X800C 21,9 r270 top
BERG144 "BergStrip" HDRV1W50P0_1X1_200X200X800C -21,7 r270 top
BERG145 "BergStrip" HDRV1W50P0_1X1_200X200X800C 23,-23 r90 top
BERG146 "BergStrip" HDRV1W50P0_1X1_200X200X800C 23,-15 r90 top
BERG147 "BergStrip" HDRV1W50P0_1X1_200X200X800C 23,-13 r90 top
BERG148 "BergStrip" HDRV1W50P0_1X1_200X200X800C 25,5 r90 top
BERG149 "BergStrip" HDRV1W50P0_1X1_200X200X800C 23,-21 r90 top
BERG150 "BergStrip" HDRV1W50P0_1X1_200X200X800C 23,-17 r90 top
BERG151 "BergStrip" HDRV1W50P0_1X1_200X200X800C -23,19 r90 top
BERG152 "BergStrip" HDRV1W50P0_1X1_200X200X800C -23,21 r90 top
BERG153 "BergStrip" HDRV1W50P0_1X1_200X200X800C -23,15 r90 top
BERG154 "BergStrip" HDRV1W50P0_1X1_200X200X800C -23,-9 r90 top
BERG155 "BergStrip" HDRV1W50P0_1X1_200X200X800C -23,17 r90 top
BERG156 "BergStrip" HDRV1W50P0_1X1_200X200X800C -23,9 r90 top
BERG157 "BergStrip" HDRV1W50P0_1X1_200X200X800C -23,23 r90 top
BERG158 "BergStrip" HDRV1W50P0_1X1_200X200X800C 25,25 r180 top
BERG159 "BergStrip" HDRV1W50P0_1X1_200X200X800C 23,25 r180 top
BERG160 "BergStrip" HDRV1W50P0_1X1_200X200X800C -23,13 r90 top
BERG161 "BergStrip" HDRV1W50P0_1X1_200X200X800C -23,7 r90 top
BERG162 "BergStrip" HDRV1W50P0_1X1_200X200X800C -23,11 r90 top
BERG163 "BergStrip" HDRV1W50P0_1X1_200X200X800C -23,-11 r90 top
BERG164 "BergStrip" HDRV1W50P0_1X1_200X200X800C -23,-13 r90 top
BERG165 "BergStrip" HDRV1W50P0_1X1_200X200X800C -23,-23 r90 top
BERG166 "BergStrip" HDRV1W50P0_1X1_200X200X800C -25,17 r90 top
BERG167 "BergStrip" HDRV1W50P0_1X1_200X200X800C -23,-17 r90 top
BERG168 "BergStrip" HDRV1W50P0_1X1_200X200X800C -23,-19 r90 top
BERG169 "BergStrip" HDRV1W50P0_1X1_200X200X800C -23,-15 r90 top
BERG170 "BergStrip" HDRV1W50P0_1X1_200X200X800C 25,21 r90 top
BERG171 "BergStrip" HDRV1W50P0_1X1_200X200X800C -25,19 r90 top
BERG172 "BergStrip" HDRV1W50P0_1X1_200X200X800C -23,-21 r90 top
BERG173 "BergStrip" HDRV1W50P0_1X1_200X200X800C -25,21 r90 top
BERG174 "BergStrip" HDRV1W50P0_1X1_200X200X800C -25,23 r90 top
BERG175 "BergStrip" HDRV1W50P0_1X1_200X200X800C -23,-25 r90 top
BERG176 "BergStrip" HDRV1W50P0_1X1_200X200X800C 25,9 r90 top
BERG177 "BergStrip" HDRV1W50P0_1X1_200X200X800C 25,17 r90 top
BERG178 "BergStrip" HDRV1W50P0_1X1_200X200X800C 25,19 r90 top
BERG179 "BergStrip" HDRV1W50P0_1X1_200X200X800C 25,-21 r90 top
BERG180 "BergStrip" HDRV1W50P0_1X1_200X200X800C 25,-19 r90 top
BERG181 "BergStrip" HDRV1W50P0_1X1_200X200X800C 23,17 r90 top
BERG182 "BergStrip" HDRV1W50P0_1X1_200X200X800C 25,-25 r90 top
BERG183 "BergStrip" HDRV1W50P0_1X1_200X200X800C 23,23 r90 top
BERG184 "BergStrip" HDRV1W50P0_1X1_200X200X800C 25,-23 r90 top
BERG185 "BergStrip" HDRV1W50P0_1X1_200X200X800C 25,15 r90 top
BERG186 "BergStrip" HDRV1W50P0_1X1_200X200X800C 25,11 r90 top
BERG187 "BergStrip" HDRV1W50P0_1X1_200X200X800C 25,13 r90 top
BERG188 "BergStrip" HDRV1W50P0_1X1_200X200X800C 23,13 r90 top
BERG189 "BergStrip" HDRV1W50P0_1X1_200X200X800C 19,23 r180 top
BERG190 "BergStrip" HDRV1W50P0_1X1_200X200X800C 17,23 r180 top
BERG191 "BergStrip" HDRV1W50P0_1X1_200X200X800C 13,23 r180 top
BERG192 "BergStrip" HDRV1W50P0_1X1_200X200X800C 15,23 r180 top
BERG193 "BergStrip" HDRV1W50P0_1X1_200X200X800C 19,21 r270 top
BERG194 "BergStrip" HDRV1W50P0_1X1_200X200X800C 21,23 r180 top
BERG195 "BergStrip" HDRV1W50P0_1X1_200X200X800C 5,23 r180 top
BERG196 "BergStrip" HDRV1W50P0_1X1_200X200X800C 23,11 r90 top
BERG197 "BergStrip" HDRV1W50P0_1X1_200X200X800C 23,15 r90 top
BERG198 "BergStrip" HDRV1W50P0_1X1_200X200X800C 11,23 r180 top
BERG199 "BergStrip" HDRV1W50P0_1X1_200X200X800C 9,23 r180 top
BERG200 "BergStrip" HDRV1W50P0_1X1_200X200X800C 7,23 r180 top
BuckMain3.3V "Buck TPS62A06DRLR" "BUCK TPS62A06DRLR" -15,-25 r180 top
"C BuckMain3.3V Feedback" "120pF" "Capacitor 2012(0805)" -12,-23 r180 top
"C BuckMain3.3V VIN" "50uF" "Capacitor 2012(0805)" -18,-25 r0 top
"C BuckMain3.3V VOUT" "50uF" "Capacitor 2012(0805)" -12,-21 r180 top
DP83867IRRGZR "DP83867IRRGZR" DP83867IRRGZR 15,0 r180 top
"L BuckMain3.3V PowerGoodPullUp" "Inductor" "Inductor 2012(0805)" -12,-25 r0 top
LPDDR4 "Die Density: 16Gbits  Organization  x 16 bits: 128M words x 16 bits x 8 banks  2 pieces of 16Gb (x16) in one package (For 32Gb case)  Row Address: R0 ~ R16  Column Address: C0 ~ C9  Package  200-ball FBGA  Power supply  VDD1 = 1.8V (1.70V to 1.95V) ,  VDD2, VDDCA and VDDQ = 1.1V (1.06V to 1.17V)  Data rate:  3733Mbps max. Backward compatible  Eight internal banks per channel for concurrent operation  Burst lengths (BL): 16, 32 and on-the-fly - On the fly mode is enabled by   Source:  Datasheet" LPDDR4 -3,-18 r0 top
LS1 "Switch TPS22959DNYR" "SWITCH TPS22959DNYR" 9,-22 r0 top
PMIC1 "PMIC TPS6522053" "PMIC TPS6522053" -16,-13 r0 top
"R BuckMain3.3V Divider1" "Resistor" "Resistor 2012(0805)" -15,-22 r90 top
"R BuckMain3.3V Divider2" "Resistor" "Resistor 2012(0805)" -18,-23 r180 top
"R BuckMain3.3V Divider3" "Resistor" "Resistor 2012(0805)" -18,-21 r180 top
"R BuckMain3.3V PowerGoodPullUp" "Resistor" "Resistor 2012(0805)" -15,-19 r0 top
R_DDR_ODT_CA "Resistor" "RESISTOR 2012(0805)" -9,-17 r270 top
R_DDR_ZQ "Resistor" "RESISTOR 2012(0805)" -4.4,-9.7 r180 top

## Footprints (in the part's own frame and the unit in brackets; to place one, negate y for a bottom-side part, rotate by r counter-clockwise, add the part's x,y. Pads: shape width x height; smd on the part's side, far side on the other; paste and mask are expansions set on the pad)
AM6442 [mm]
  round 0.4 smd paste+0 mask+0.04: A1(-8,8) A2(-7.2,8) A3(-6.4,8) A4(-5.6,8) A5(-4.8,8) A6(-4,8) A7(-3.2,8) A8(-2.4,8) A9(-1.6,8) A10(-0.8,8) A11(0,8) A12(0.8,8) A13(1.6,8) A14(2.4,8) A15(3.2,8) A16(4,8) A17(4.8,8) A18(5.6,8) A19(6.4,8) A20(7.2,8) A21(8,8) AA1(-8,-8) AA2(-7.2,-8) AA3(-6.4,-8) AA4(-5.6,-8) AA5(-4.8,-8) AA6(-4,-8) AA7(-3.2,-8) AA8(-2.4,-8) AA9(-1.6,-8) AA10(-0.8,-8) AA11(0,-8) AA12(0.8,-8) AA13(1.6,-8) AA14(2.4,-8) AA15(3.2,-8) AA16(4,-8) AA17(4.8,-8) AA18(5.6,-8) AA19(6.4,-8) AA20(7.2,-8) AA21(8,-8) B1(-8,7.2) B2(-7.2,7.2) B3(-6.4,7.2) B4(-5.6,7.2) B5(-4.8,7.2) B6(-4,7.2) B7(-3.2,7.2) B8(-2.4,7.2) B9(-1.6,7.2) B10(-0.8,7.2) B11(0,7.2) B12(0.8,7.2) B13(1.6,7.2) B14(2.4,7.2) B15(3.2,7.2) B16(4,7.2) B17(4.8,7.2) B18(5.6,7.2) B19(6.4,7.2) B20(7.2,7.2) B21(8,7.2) C1(-8,6.4) C2(-7.2,6.4) C3(-6.4,6.4) C4(-5.6,6.4) C5(-4.8,6.4) C6(-4,6.4) C7(-3.2,6.4) C8(-2.4,6.4) C9(-1.6,6.4) C10(-0.8,6.4) C11(0,6.4) C12(0.8,6.4) C13(1.6,6.4) C14(2.4,6.4) C15(3.2,6.4) C16(4,6.4) C17(4.8,6.4) C18(5.6,6.4) C19(6.4,6.4) C20(7.2,6.4) C21(8,6.4) D1(-8,5.6) D2(-7.2,5.6) D3(-6.4,5.6) D4(-5.6,5.6) D5(-4.8,5.6) D6(-4,5.6) D7(-3.2,5.6) D8(-2.4,5.6) D9(-1.6,5.6) D10(-0.8,5.6) D11(0,5.6) D12(0.8,5.6) D13(1.6,5.6) D14(2.4,5.6) D15(3.2,5.6) D16(4,5.6) D17(4.8,5.6) D18(5.6,5.6) D19(6.4,5.6) D20(7.2,5.6) D21(8,5.6) E1(-8,4.8) E2(-7.2,4.8) E3(-6.4,4.8) E4(-5.6,4.8) E5(-4.8,4.8) E6(-4,4.8) E7(-3.2,4.8) E8(-2.4,4.8) E9(-1.6,4.8) E10(-0.8,4.8) E11(0,4.8) E12(0.8,4.8) E13(1.6,4.8) E14(2.4,4.8) E15(3.2,4.8) E16(4,4.8) E17(4.8,4.8) E18(5.6,4.8) E19(6.4,4.8) E20(7.2,4.8) E21(8,4.8) F1(-8,4) F2(-7.2,4) F3(-6.4,4) F4(-5.6,4) F5(-4.8,4) F6(-4,4) F7(-3.2,4) F8(-2.4,4) F9(-1.6,4) F10(-0.8,4) F11(0,4) F12(0.8,4) F13(1.6,4) F14(2.4,4) F15(3.2,4) F16(4,4) F17(4.8,4) F18(5.6,4) F19(6.4,4) F20(7.2,4) F21(8,4) G1(-8,3.2) G2(-7.2,3.2) G3(-6.4,3.2) G4(-5.6,3.2) G5(-4.8,3.2) G6(-4,3.2) G7(-3.2,3.2) G8(-2.4,3.2) G9(-1.6,3.2) G10(-0.8,3.2) G11(0,3.2) G12(0.8,3.2) G13(1.6,3.2) G14(2.4,3.2) G15(3.2,3.2) G16(4,3.2) G17(4.8,3.2) G18(5.6,3.2) G19(6.4,3.2) G20(7.2,3.2) G21(8,3.2) H1(-8,2.4) H2(-7.2,2.4) H3(-6.4,2.4) H4(-5.6,2.4) H5(-4.8,2.4) H6(-4,2.4) H7(-3.2,2.4) H8(-2.4,2.4) H9(-1.6,2.4) H10(-0.8,2.4) H11(0,2.4) H12(0.8,2.4) H13(1.6,2.4) H14(2.4,2.4) H15(3.2,2.4) H16(4,2.4) H17(4.8,2.4) H18(5.6,2.4) H19(6.4,2.4) H20(7.2,2.4) H21(8,2.4) J1(-8,1.6) J2(-7.2,1.6) J3(-6.4,1.6) J4(-5.6,1.6) J5(-4.8,1.6) J6(-4,1.6) J7(-3.2,1.6) J8(-2.4,1.6) J9(-1.6,1.6) J10(-0.8,1.6) J11(0,1.6) J12(0.8,1.6) J13(1.6,1.6) J14(2.4,1.6) J15(3.2,1.6) J16(4,1.6) J17(4.8,1.6) J18(5.6,1.6) J19(6.4,1.6) J20(7.2,1.6) J21(8,1.6) K1(-8,0.8) K2(-7.2,0.8) K3(-6.4,0.8) K4(-5.6,0.8) K5(-4.8,0.8) K6(-4,0.8) K7(-3.2,0.8) K8(-2.4,0.8) K9(-1.6,0.8) K10(-0.8,0.8) K11(0,0.8) K12(0.8,0.8) K13(1.6,0.8) K14(2.4,0.8) K15(3.2,0.8) K16(4,0.8) K17(4.8,0.8) K18(5.6,0.8) K19(6.4,0.8) K20(7.2,0.8) K21(8,0.8) L1(-8,0) L2(-7.2,0) L3(-6.4,0) L4(-5.6,0) L5(-4.8,0) L6(-4,0) L7(-3.2,0) L8(-2.4,0) L9(-1.6,0) L10(-0.8,0) L11(0,0) L12(0.8,0) L13(1.6,0) L14(2.4,0) L15(3.2,0) L16(4,0) L17(4.8,0) L18(5.6,0) L19(6.4,0) L20(7.2,0) L21(8,0) M1(-8,-0.8) M2(-7.2,-0.8) M3(-6.4,-0.8) M4(-5.6,-0.8) M5(-4.8,-0.8) M6(-4,-0.8) M7(-3.2,-0.8) M8(-2.4,-0.8) M9(-1.6,-0.8) M10(-0.8,-0.8) M11(0,-0.8) M12(0.8,-0.8) M13(1.6,-0.8) M14(2.4,-0.8) M15(3.2,-0.8) M16(4,-0.8) M17(4.8,-0.8) M18(5.6,-0.8) M19(6.4,-0.8) M20(7.2,-0.8) M21(8,-0.8) N1(-8,-1.6) N2(-7.2,-1.6) N3(-6.4,-1.6) N4(-5.6,-1.6) N5(-4.8,-1.6) N6(-4,-1.6) N7(-3.2,-1.6) N8(-2.4,-1.6) N9(-1.6,-1.6) N10(-0.8,-1.6) N11(0,-1.6) N12(0.8,-1.6) N13(1.6,-1.6) N14(2.4,-1.6) N15(3.2,-1.6) N16(4,-1.6) N17(4.8,-1.6) N18(5.6,-1.6) N19(6.4,-1.6) N20(7.2,-1.6) N21(8,-1.6) P1(-8,-2.4) P2(-7.2,-2.4) P3(-6.4,-2.4) P4(-5.6,-2.4) P5(-4.8,-2.4) P6(-4,-2.4) P7(-3.2,-2.4) P8(-2.4,-2.4) P9(-1.6,-2.4) P10(-0.8,-2.4) P11(0,-2.4) P12(0.8,-2.4) P13(1.6,-2.4) P14(2.4,-2.4) P15(3.2,-2.4) P16(4,-2.4) P17(4.8,-2.4) P18(5.6,-2.4) P19(6.4,-2.4) P20(7.2,-2.4) P21(8,-2.4) R1(-8,-3.2) R2(-7.2,-3.2) R3(-6.4,-3.2) R4(-5.6,-3.2) R5(-4.8,-3.2) R6(-4,-3.2) R7(-3.2,-3.2) R8(-2.4,-3.2) R9(-1.6,-3.2) R10(-0.8,-3.2) R11(0,-3.2) R12(0.8,-3.2) R13(1.6,-3.2) R14(2.4,-3.2) R15(3.2,-3.2) R16(4,-3.2) R17(4.8,-3.2) R18(5.6,-3.2) R19(6.4,-3.2) R20(7.2,-3.2) R21(8,-3.2) T1(-8,-4) T2(-7.2,-4) T3(-6.4,-4) T4(-5.6,-4) T5(-4.8,-4) T6(-4,-4) T7(-3.2,-4) T8(-2.4,-4) T9(-1.6,-4) T10(-0.8,-4) T11(0,-4) T12(0.8,-4) T13(1.6,-4) T14(2.4,-4) T15(3.2,-4) T16(4,-4) T17(4.8,-4) T18(5.6,-4) T19(6.4,-4) T20(7.2,-4) T21(8,-4) U1(-8,-4.8) U2(-7.2,-4.8) U3(-6.4,-4.8) U4(-5.6,-4.8) U5(-4.8,-4.8) U6(-4,-4.8) U7(-3.2,-4.8) U8(-2.4,-4.8) U9(-1.6,-4.8) U10(-0.8,-4.8) U11(0,-4.8) U12(0.8,-4.8) U13(1.6,-4.8) U14(2.4,-4.8) U15(3.2,-4.8) U16(4,-4.8) U17(4.8,-4.8) U18(5.6,-4.8) U19(6.4,-4.8) U20(7.2,-4.8) U21(8,-4.8) V1(-8,-5.6) V2(-7.2,-5.6) V3(-6.4,-5.6) V4(-5.6,-5.6) V5(-4.8,-5.6) V6(-4,-5.6) V7(-3.2,-5.6) V8(-2.4,-5.6) V9(-1.6,-5.6) V10(-0.8,-5.6) V11(0,-5.6) V12(0.8,-5.6) V13(1.6,-5.6) V14(2.4,-5.6) V15(3.2,-5.6) V16(4,-5.6) V17(4.8,-5.6) V18(5.6,-5.6) V19(6.4,-5.6) V20(7.2,-5.6) V21(8,-5.6) W1(-8,-6.4) W2(-7.2,-6.4) W3(-6.4,-6.4) W4(-5.6,-6.4) W5(-4.8,-6.4) W6(-4,-6.4) W7(-3.2,-6.4) W8(-2.4,-6.4) W9(-1.6,-6.4) W10(-0.8,-6.4) W11(0,-6.4) W12(0.8,-6.4) W13(1.6,-6.4) W14(2.4,-6.4) W15(3.2,-6.4) W16(4,-6.4) W17(4.8,-6.4) W18(5.6,-6.4) W19(6.4,-6.4) W20(7.2,-6.4) W21(8,-6.4) Y1(-8,-7.2) Y2(-7.2,-7.2) Y3(-6.4,-7.2) Y4(-5.6,-7.2) Y5(-4.8,-7.2) Y6(-4,-7.2) Y7(-3.2,-7.2) Y8(-2.4,-7.2) Y9(-1.6,-7.2) Y10(-0.8,-7.2) Y11(0,-7.2) Y12(0.8,-7.2) Y13(1.6,-7.2) Y14(2.4,-7.2) Y15(3.2,-7.2) Y16(4,-7.2) Y17(4.8,-7.2) Y18(5.6,-7.2) Y19(6.4,-7.2) Y20(7.2,-7.2) Y21(8,-7.2)
  silkscreen extent -8.65,-8.65 8.65,8.65, body extent -8.65,-8.65 8.65,8.65, height 2.41
"BUCK TPS62A06DRLR" [mm]
  rect 0.67x0.3 smd paste+0 mask+0: 1(-0.74,0.5) 2(-0.74,0) 3(-0.74,-0.5) 4(0.74,-0.5) 5(0.74,0) 6(0.74,0.5)
  silkscreen extent -0.8,-0.8 0.8,0.8, body extent -0.8,-0.78 0.8,0.78, height 0.6
"Capacitor 2012(0805)" [mm]
  rect 0.95x1.4 smd: 1(-0.95,0) 2(0.95,0)
  silkscreen extent -1.6,-0.9 1.6,0.9, body extent -1,-0.63 1,0.63, height 0.85
DP83867IRRGZR [mm]
  oval 0.6x0.24 smd paste+0 mask+0.051: 1(-3.4,2.75) 2(-3.4,2.25) 3(-3.4,1.75) 4(-3.4,1.25) 5(-3.4,0.75) 6(-3.4,0.25) 7(-3.4,-0.25) 8(-3.4,-0.75) 9(-3.4,-1.25) 10(-3.4,-1.75) 11(-3.4,-2.25) 12(-3.4,-2.75) 25(3.4,-2.75) 26(3.4,-2.25) 27(3.4,-1.75) 28(3.4,-1.25) 29(3.4,-0.75) 30(3.4,-0.25) 31(3.4,0.25) 32(3.4,0.75) 33(3.4,1.25) 34(3.4,1.75) 35(3.4,2.25) 36(3.4,2.75)
  oval 0.24x0.6 smd paste+0 mask+0.051: 13(-2.75,-3.4) 14(-2.25,-3.4) 15(-1.75,-3.4) 16(-1.25,-3.4) 17(-0.75,-3.4) 18(-0.25,-3.4) 19(0.25,-3.4) 20(0.75,-3.4) 21(1.25,-3.4) 22(1.75,-3.4) 23(2.25,-3.4) 24(2.75,-3.4) 37(2.75,3.4) 38(2.25,3.4) 39(1.75,3.4) 40(1.25,3.4) 41(0.75,3.4) 42(0.25,3.4) 43(-0.25,3.4) 44(-0.75,3.4) 45(-1.25,3.4) 46(-1.75,3.4) 47(-2.25,3.4) 48(-2.75,3.4)
  rect 4.1x4.1 smd paste-2.037 mask+0.051: 49(0,0)
  silkscreen extent -3.72,-3.72 3.72,3.72, body extent -3.5,-3.5 3.5,3.5, height 1
HDRV1W50P0_1X1_200X200X800C [mm]
  rect 1.2x1.2 / inner round 1.109 / far side rect 1.2x1.2 hole 0.75: ""(0,0)
  silkscreen extent -0.9,-0.9 0.9,0.9
"Inductor 2012(0805)" [mm]
  rect 0.95x1.4 smd: 1(-0.95,0) 2(0.95,0)
  silkscreen extent -1.6,-0.9 1.6,0.9, body extent -1,-0.6 1,0.6, height 0.9
LPDDR4 [mm]
  round 0.3 smd paste+0 mask+0.04: A1(-4.4,6.825) A2(-3.6,6.825) A3(-2.8,6.825) A4(-2,6.825) A5(-1.2,6.825) A8(1.2,6.825) A9(2,6.825) A10(2.8,6.825) A11(3.6,6.825) A12(4.4,6.825) AA1(-4.4,-6.175) AA2(-3.6,-6.175) AA3(-2.8,-6.175) AA4(-2,-6.175) AA5(-1.2,-6.175) AA8(1.2,-6.175) AA9(2,-6.175) AA10(2.8,-6.175) AA11(3.6,-6.175) AA12(4.4,-6.175) AB1(-4.4,-6.825) AB2(-3.6,-6.825) AB3(-2.8,-6.825) AB4(-2,-6.825) AB5(-1.2,-6.825) AB8(1.2,-6.825) AB9(2,-6.825) AB10(2.8,-6.825) AB11(3.6,-6.825) AB12(4.4,-6.825) B1(-4.4,6.175) B2(-3.6,6.175) B3(-2.8,6.175) B4(-2,6.175) B5(-1.2,6.175) B8(1.2,6.175) B9(2,6.175) B10(2.8,6.175) B11(3.6,6.175) B12(4.4,6.175) C1(-4.4,5.525) C2(-3.6,5.525) C3(-2.8,5.525) C4(-2,5.525) C5(-1.2,5.525) C8(1.2,5.525) C9(2,5.525) C10(2.8,5.525) C11(3.6,5.525) C12(4.4,5.525) D1(-4.4,4.875) D2(-3.6,4.875) D3(-2.8,4.875) D4(-2,4.875) D5(-1.2,4.875) D8(1.2,4.875) D9(2,4.875) D10(2.8,4.875) D11(3.6,4.875) D12(4.4,4.875) E1(-4.4,4.225) E2(-3.6,4.225) E3(-2.8,4.225) E4(-2,4.225) E5(-1.2,4.225) E8(1.2,4.225) E9(2,4.225) E10(2.8,4.225) E11(3.6,4.225) E12(4.4,4.225) F1(-4.4,3.575) F2(-3.6,3.575) F3(-2.8,3.575) F4(-2,3.575) F5(-1.2,3.575) F8(1.2,3.575) F9(2,3.575) F10(2.8,3.575) F11(3.6,3.575) F12(4.4,3.575) G1(-4.4,2.925) G2(-3.6,2.925) G3(-2.8,2.925) G4(-2,2.925) G5(-1.2,2.925) G8(1.2,2.925) G9(2,2.925) G10(2.8,2.925) G11(3.6,2.925) G12(4.4,2.925) H1(-4.4,2.275) H2(-3.6,2.275) H3(-2.8,2.275) H4(-2,2.275) H5(-1.2,2.275) H8(1.2,2.275) H9(2,2.275) H10(2.8,2.275) H11(3.6,2.275) H12(4.4,2.275) J1(-4.4,1.625) J2(-3.6,1.625) J3(-2.8,1.625) J4(-2,1.625) J5(-1.2,1.625) J8(1.2,1.625) J9(2,1.625) J10(2.8,1.625) J11(3.6,1.625) J12(4.4,1.625) K1(-4.4,0.975) K2(-3.6,0.975) K3(-2.8,0.975) K4(-2,0.975) K5(-1.2,0.975) K8(1.2,0.975) K9(2,0.975) K10(2.8,0.975) K11(3.6,0.975) K12(4.4,0.975) N1(-4.4,-0.975) N2(-3.6,-0.975) N3(-2.8,-0.975) N4(-2,-0.975) N5(-1.2,-0.975) N8(1.2,-0.975) N9(2,-0.975) N10(2.8,-0.975) N11(3.6,-0.975) N12(4.4,-0.975) P1(-4.4,-1.625) P2(-3.6,-1.625) P3(-2.8,-1.625) P4(-2,-1.625) P5(-1.2,-1.625) P8(1.2,-1.625) P9(2,-1.625) P10(2.8,-1.625) P11(3.6,-1.625) P12(4.4,-1.625) R1(-4.4,-2.275) R2(-3.6,-2.275) R3(-2.8,-2.275) R4(-2,-2.275) R5(-1.2,-2.275) R8(1.2,-2.275) R9(2,-2.275) R10(2.8,-2.275) R11(3.6,-2.275) R12(4.4,-2.275) T1(-4.4,-2.925) T2(-3.6,-2.925) T3(-2.8,-2.925) T4(-2,-2.925) T5(-1.2,-2.925) T8(1.2,-2.925) T9(2,-2.925) T10(2.8,-2.925) T11(3.6,-2.925) T12(4.4,-2.925) U1(-4.4,-3.575) U2(-3.6,-3.575) U3(-2.8,-3.575) U4(-2,-3.575) U5(-1.2,-3.575) U8(1.2,-3.575) U9(2,-3.575) U10(2.8,-3.575) U11(3.6,-3.575) U12(4.4,-3.575) V1(-4.4,-4.225) V2(-3.6,-4.225) V3(-2.8,-4.225) V4(-2,-4.225) V5(-1.2,-4.225) V8(1.2,-4.225) V9(2,-4.225) V10(2.8,-4.225) V11(3.6,-4.225) V12(4.4,-4.225) W1(-4.4,-4.875) W2(-3.6,-4.875) W3(-2.8,-4.875) W4(-2,-4.875) W5(-1.2,-4.875) W8(1.2,-4.875) W9(2,-4.875) W10(2.8,-4.875) W11(3.6,-4.875) W12(4.4,-4.875) Y1(-4.4,-5.525) Y2(-3.6,-5.525) Y3(-2.8,-5.525) Y4(-2,-5.525) Y5(-1.2,-5.525) Y8(1.2,-5.525) Y9(2,-5.525) Y10(2.8,-5.525) Y11(3.6,-5.525) Y12(4.4,-5.525)
  silkscreen extent -5,-7.25 5,7.25, body extent -5,-7.25 5,7.25, height 0.8
"PMIC TPS6522053" [mm]
  rect 0.708x0.255 smd paste+0 mask+0: 1(-2.399,1.75) 2(-2.399,1.25) 3(-2.399,0.75) 4(-2.399,0.25) 5(-2.399,-0.25) 6(-2.399,-0.75) 7(-2.399,-1.25) 8(-2.399,-1.75) 17(2.399,-1.75) 18(2.399,-1.25) 19(2.399,-0.75) 20(2.399,-0.25) 21(2.399,0.25) 22(2.399,0.75) 23(2.399,1.25) 24(2.399,1.75)
  rect 0.255x0.708 smd paste+0 mask+0: 9(-1.75,-2.399) 10(-1.25,-2.399) 11(-0.75,-2.399) 12(-0.25,-2.399) 13(0.25,-2.399) 14(0.75,-2.399) 15(1.25,-2.399) 16(1.75,-2.399) 25(1.75,2.399) 26(1.25,2.399) 27(0.75,2.399) 28(0.25,2.399) 29(-0.25,2.399) 30(-0.75,2.399) 31(-1.25,2.399) 32(-1.75,2.399)
  rect 3.81x3.81 smd paste+0 mask+0: 33(0,0)
  silkscreen extent -2.68,-2.68 2.68,2.68, body extent -2.55,-2.55 2.55,2.55, height 0.99
"Resistor 2012(0805)" [mm]
  rect 0.95x1.4 smd: 1(-0.95,0) 2(0.95,0)
  silkscreen extent -1.6,-0.9 1.6,0.9, body extent -1,-0.63 1,0.63, height 0.55
"RESISTOR 2012(0805)" [mm]
  rect 0.95x1.4 smd: 1(-0.95,0) 2(0.95,0)
  silkscreen extent -1.6,-0.9 1.6,0.9, body extent -1,-0.63 1,0.63, height 0.55
"SWITCH TPS22959DNYR" [mm]
  rect 0.5x0.3 smd paste-0.102 mask+0.051: 1(-1.35,0.975) 2(-1.35,0.325) 3(-1.35,-0.325) 4(-1.35,-0.975) 5(1.35,-0.975) 6(1.35,-0.325) 7(1.35,0.325) 8(1.35,0.975)
  rect 1.6x2.4 smd paste-0.8 mask+0.051: 9(0,0)
  silkscreen extent -1.5,-1.5 1.5,1.5, body extent -1.5,-1.5 1.5,1.5, height 0.8